# Altium PCB PCB1.PcbDoc (part 1 of 5)
Units mm, origin at the board's own origin, x right, y up, seen from the top; angles counter-clockwise.
Board outline 160 x 110 mm, 4 copper layers (Top Layer, Power Layer, GND Layer, Bottom Layer), stack 1.714 mm thick; 504 components, 362 nets, 1765 pads, 999 vias.
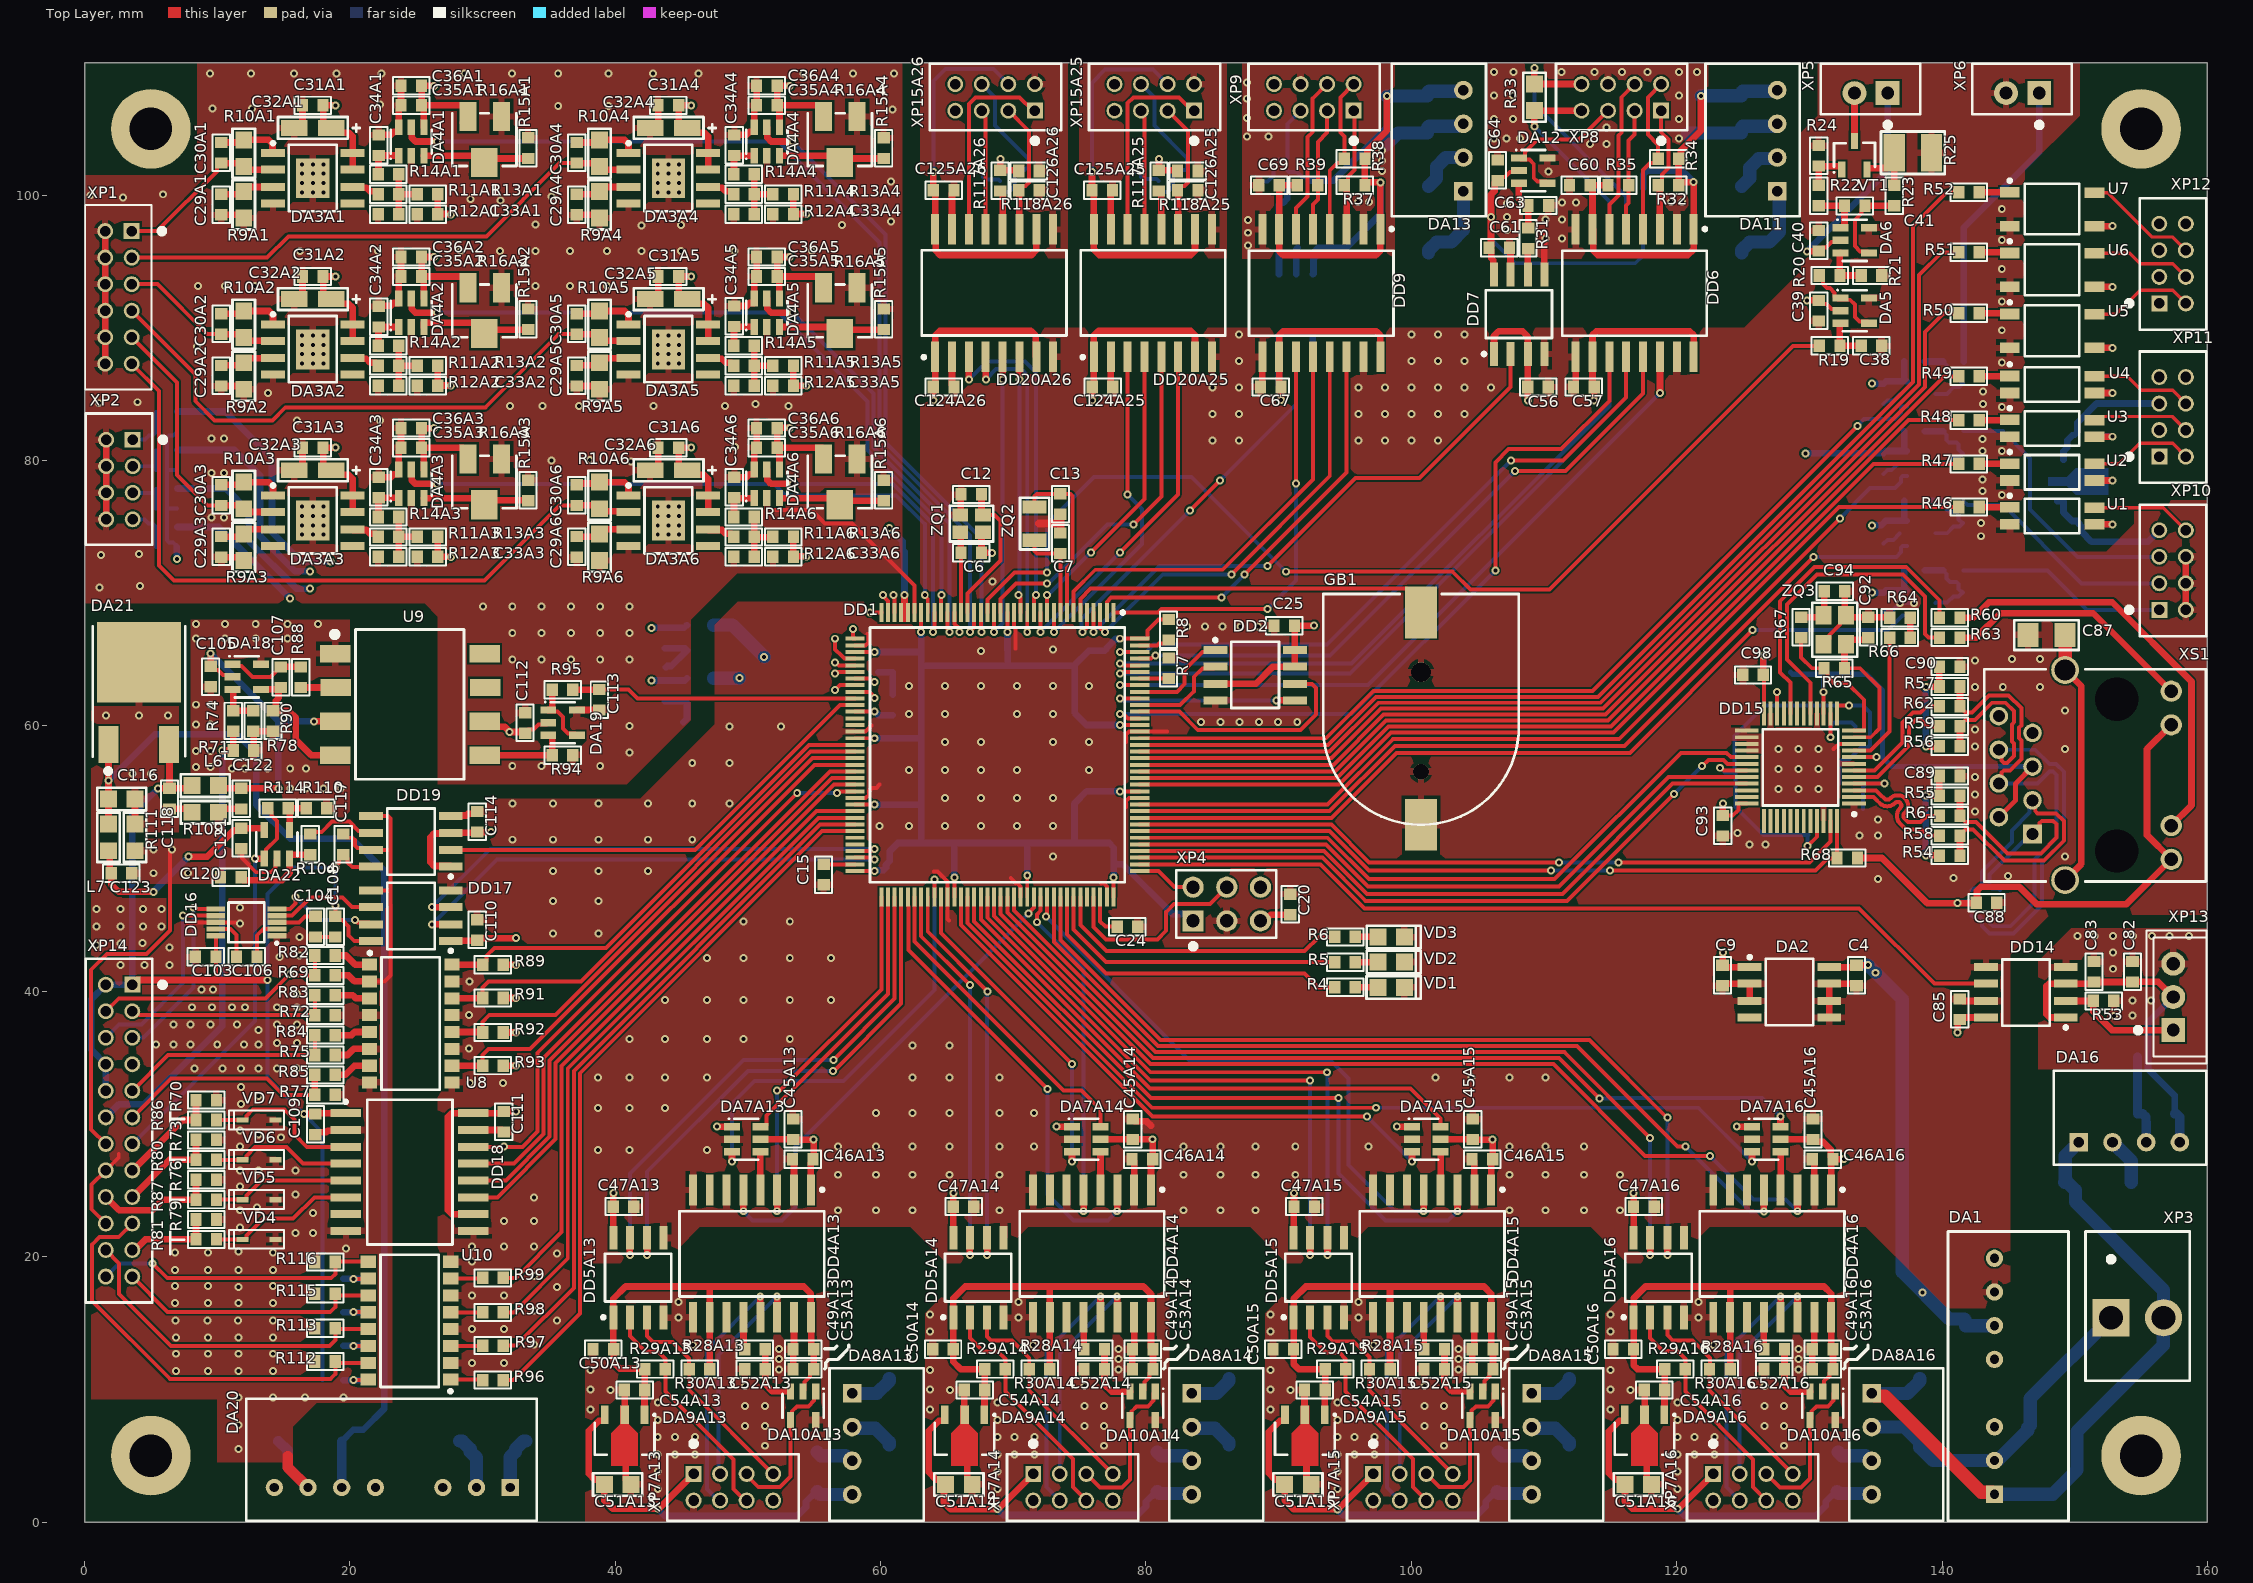
[diagram p0: Top Layer view]
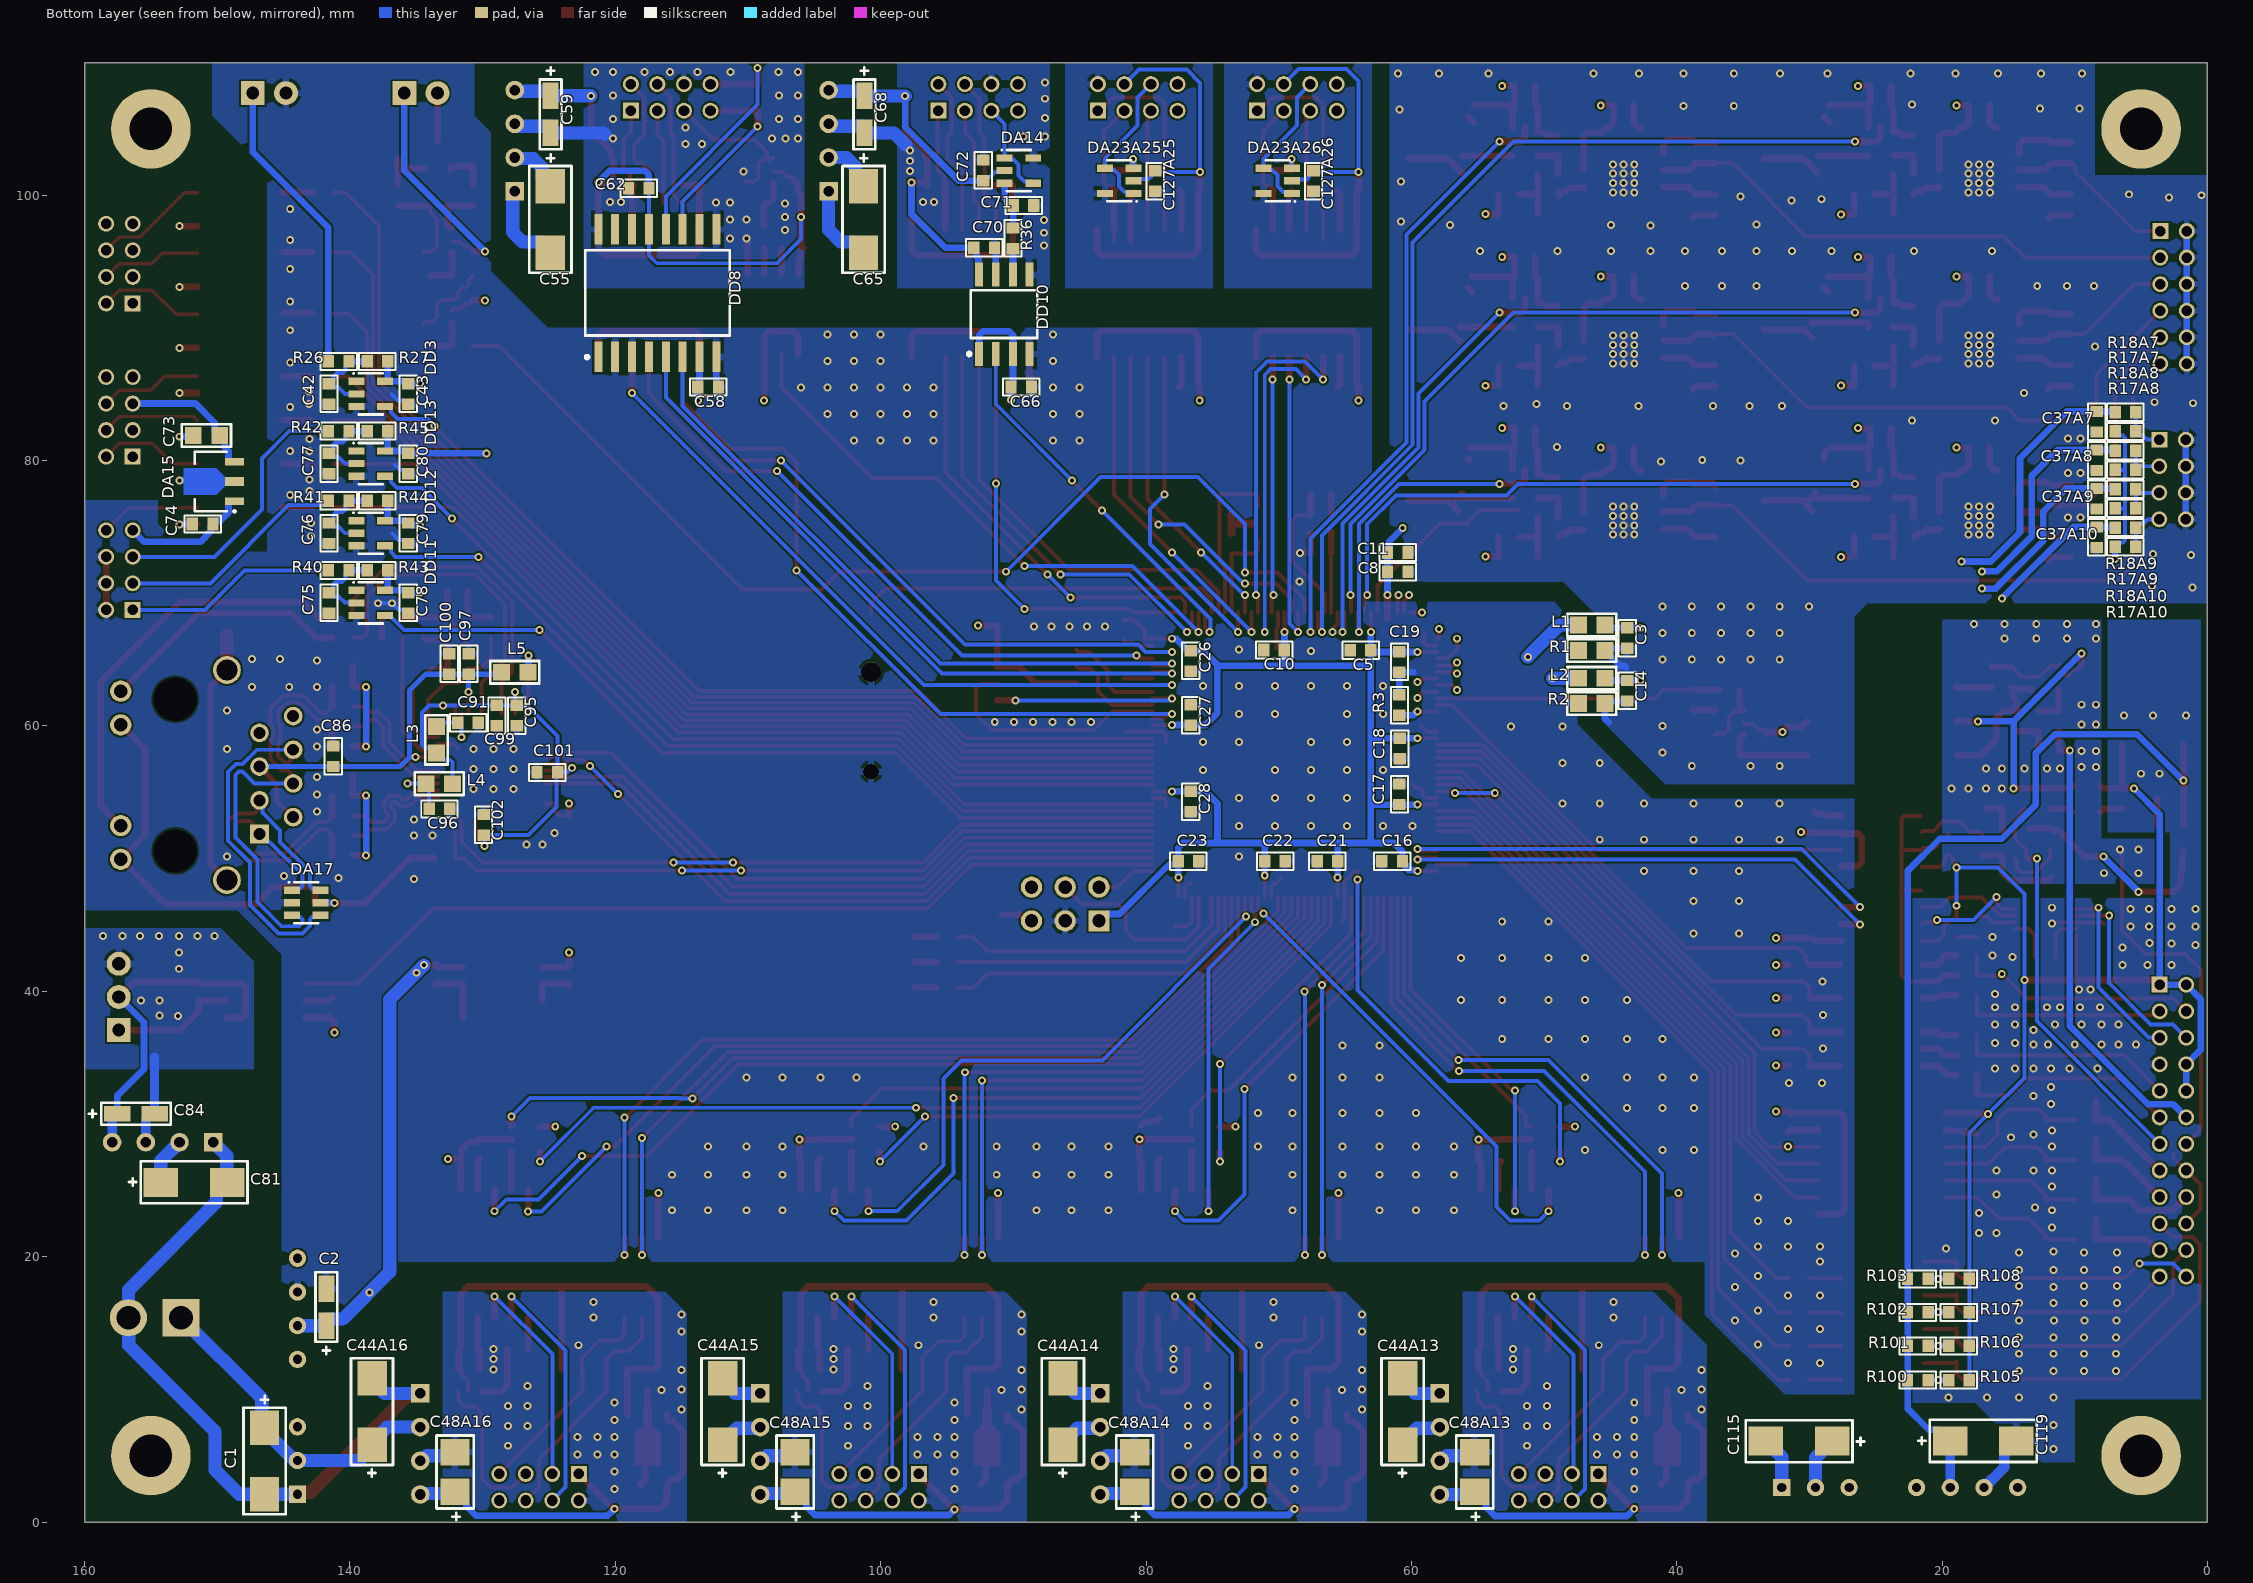
[diagram p1: Bottom Layer view, seen from below]
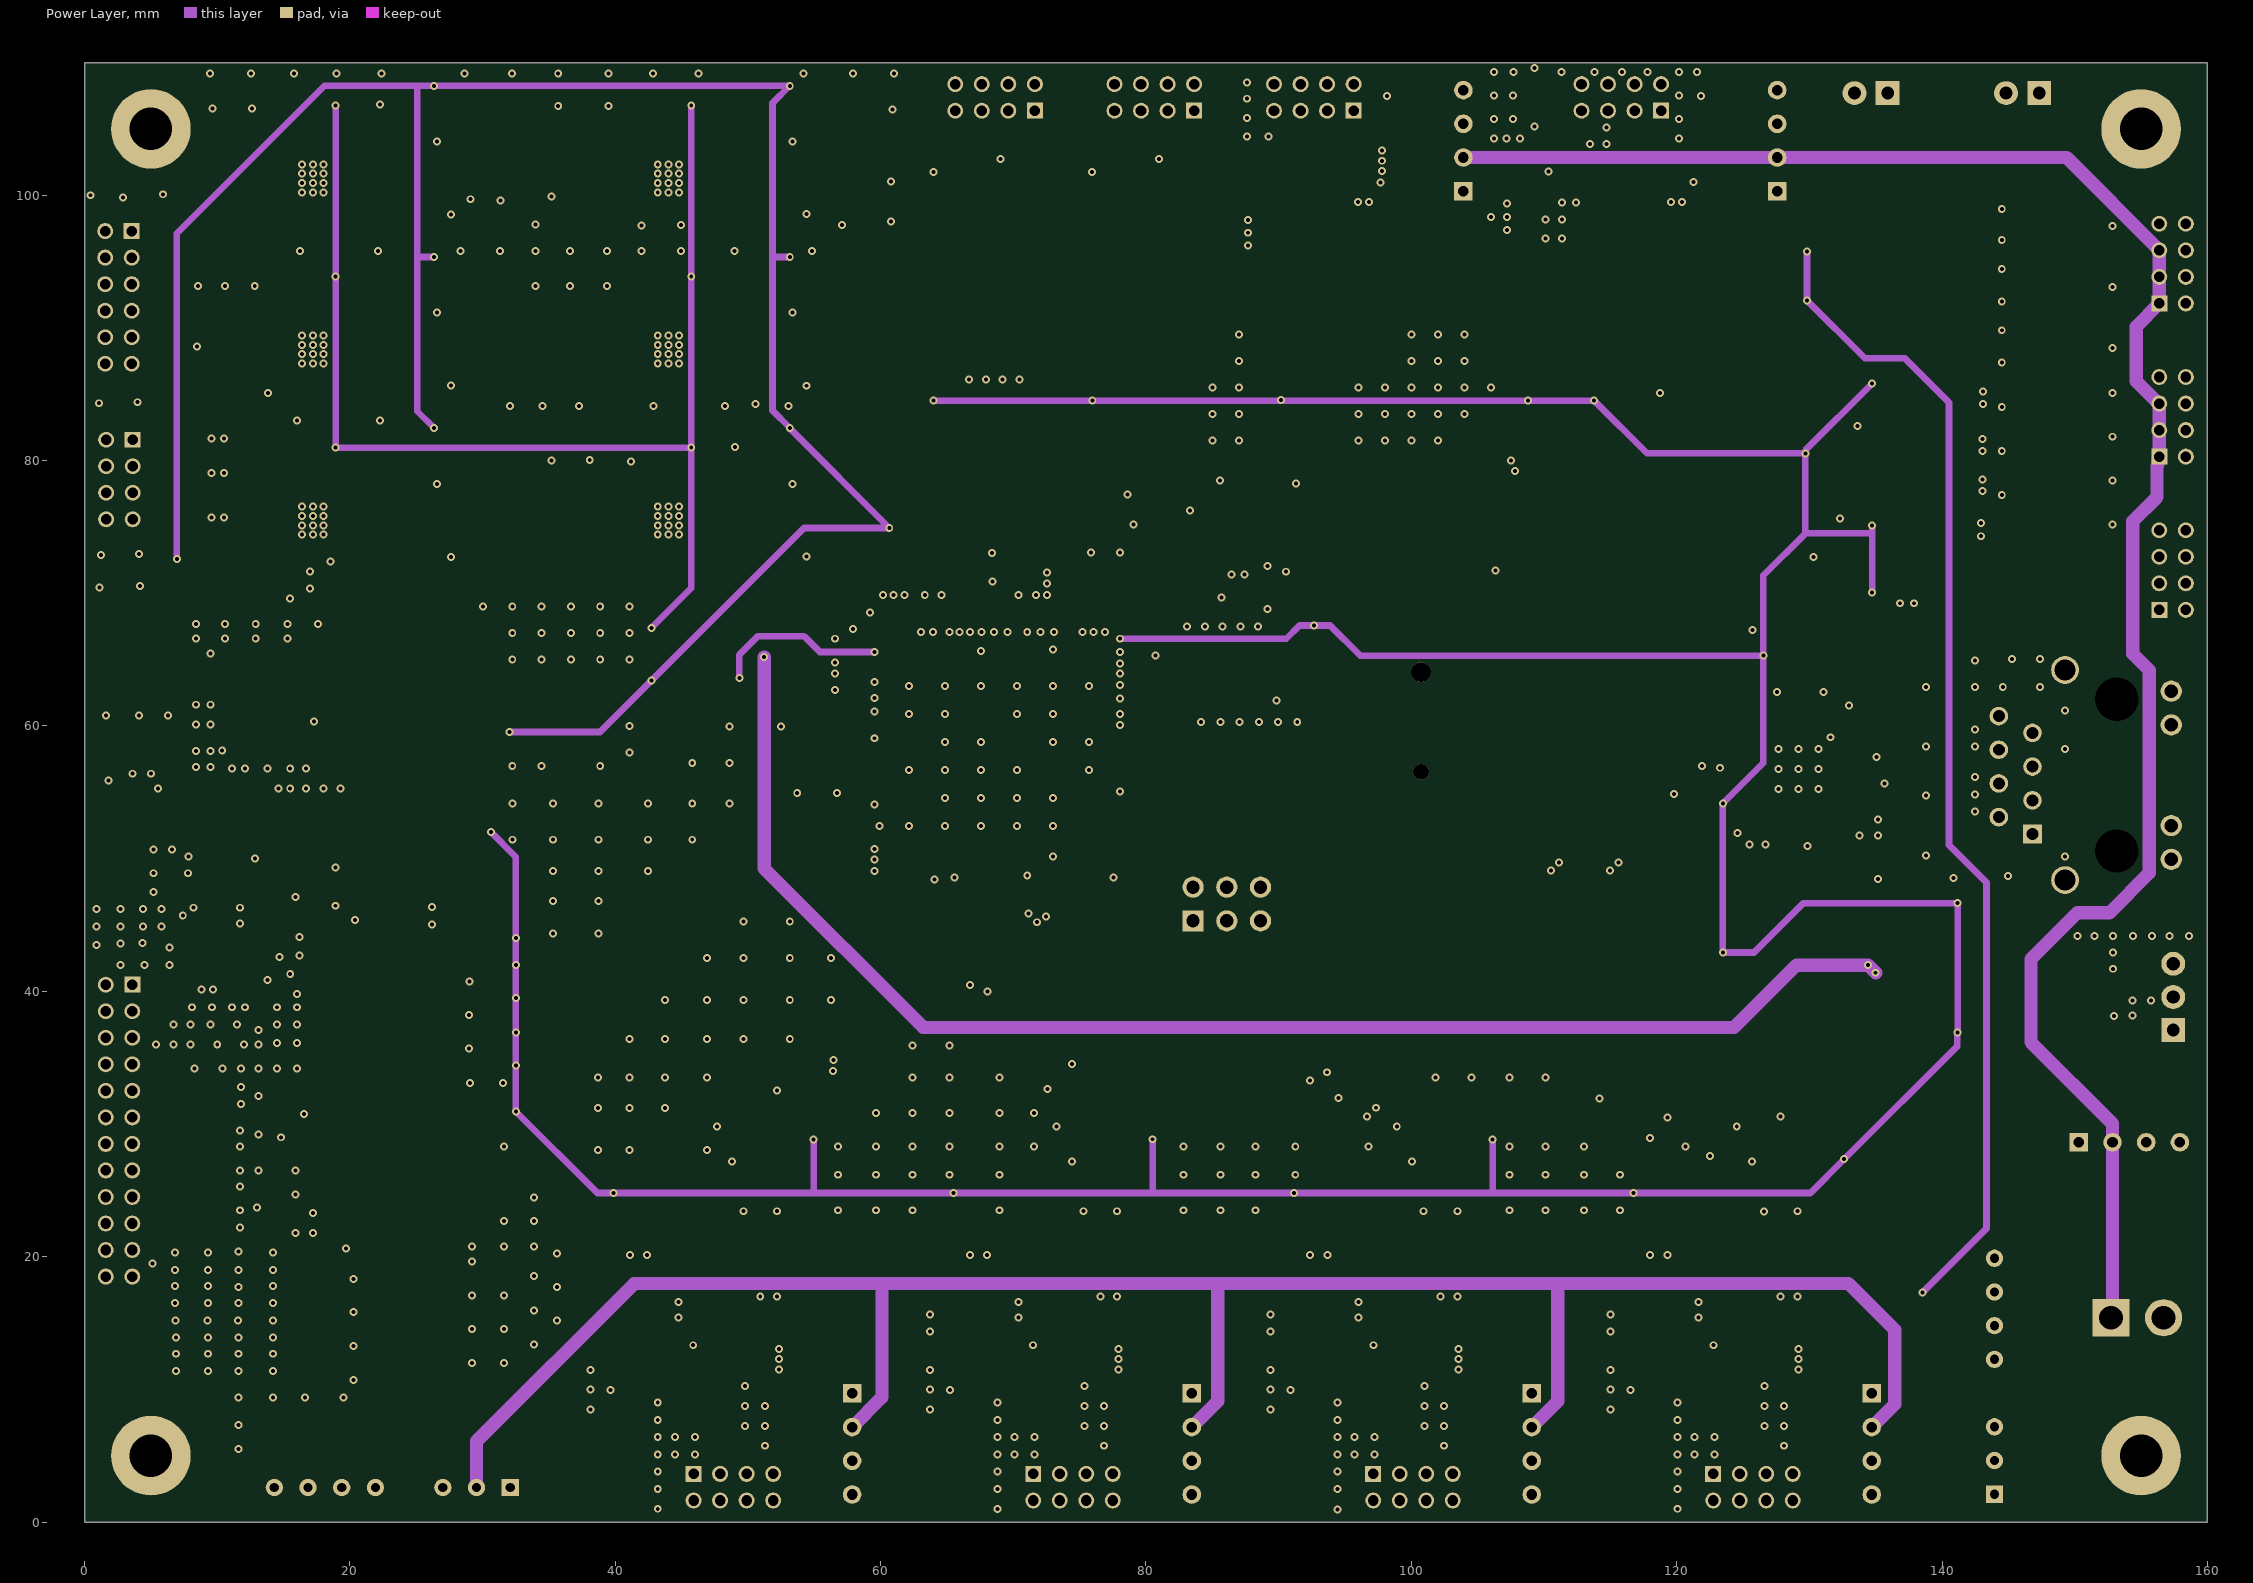
[diagram p2: Power Layer]
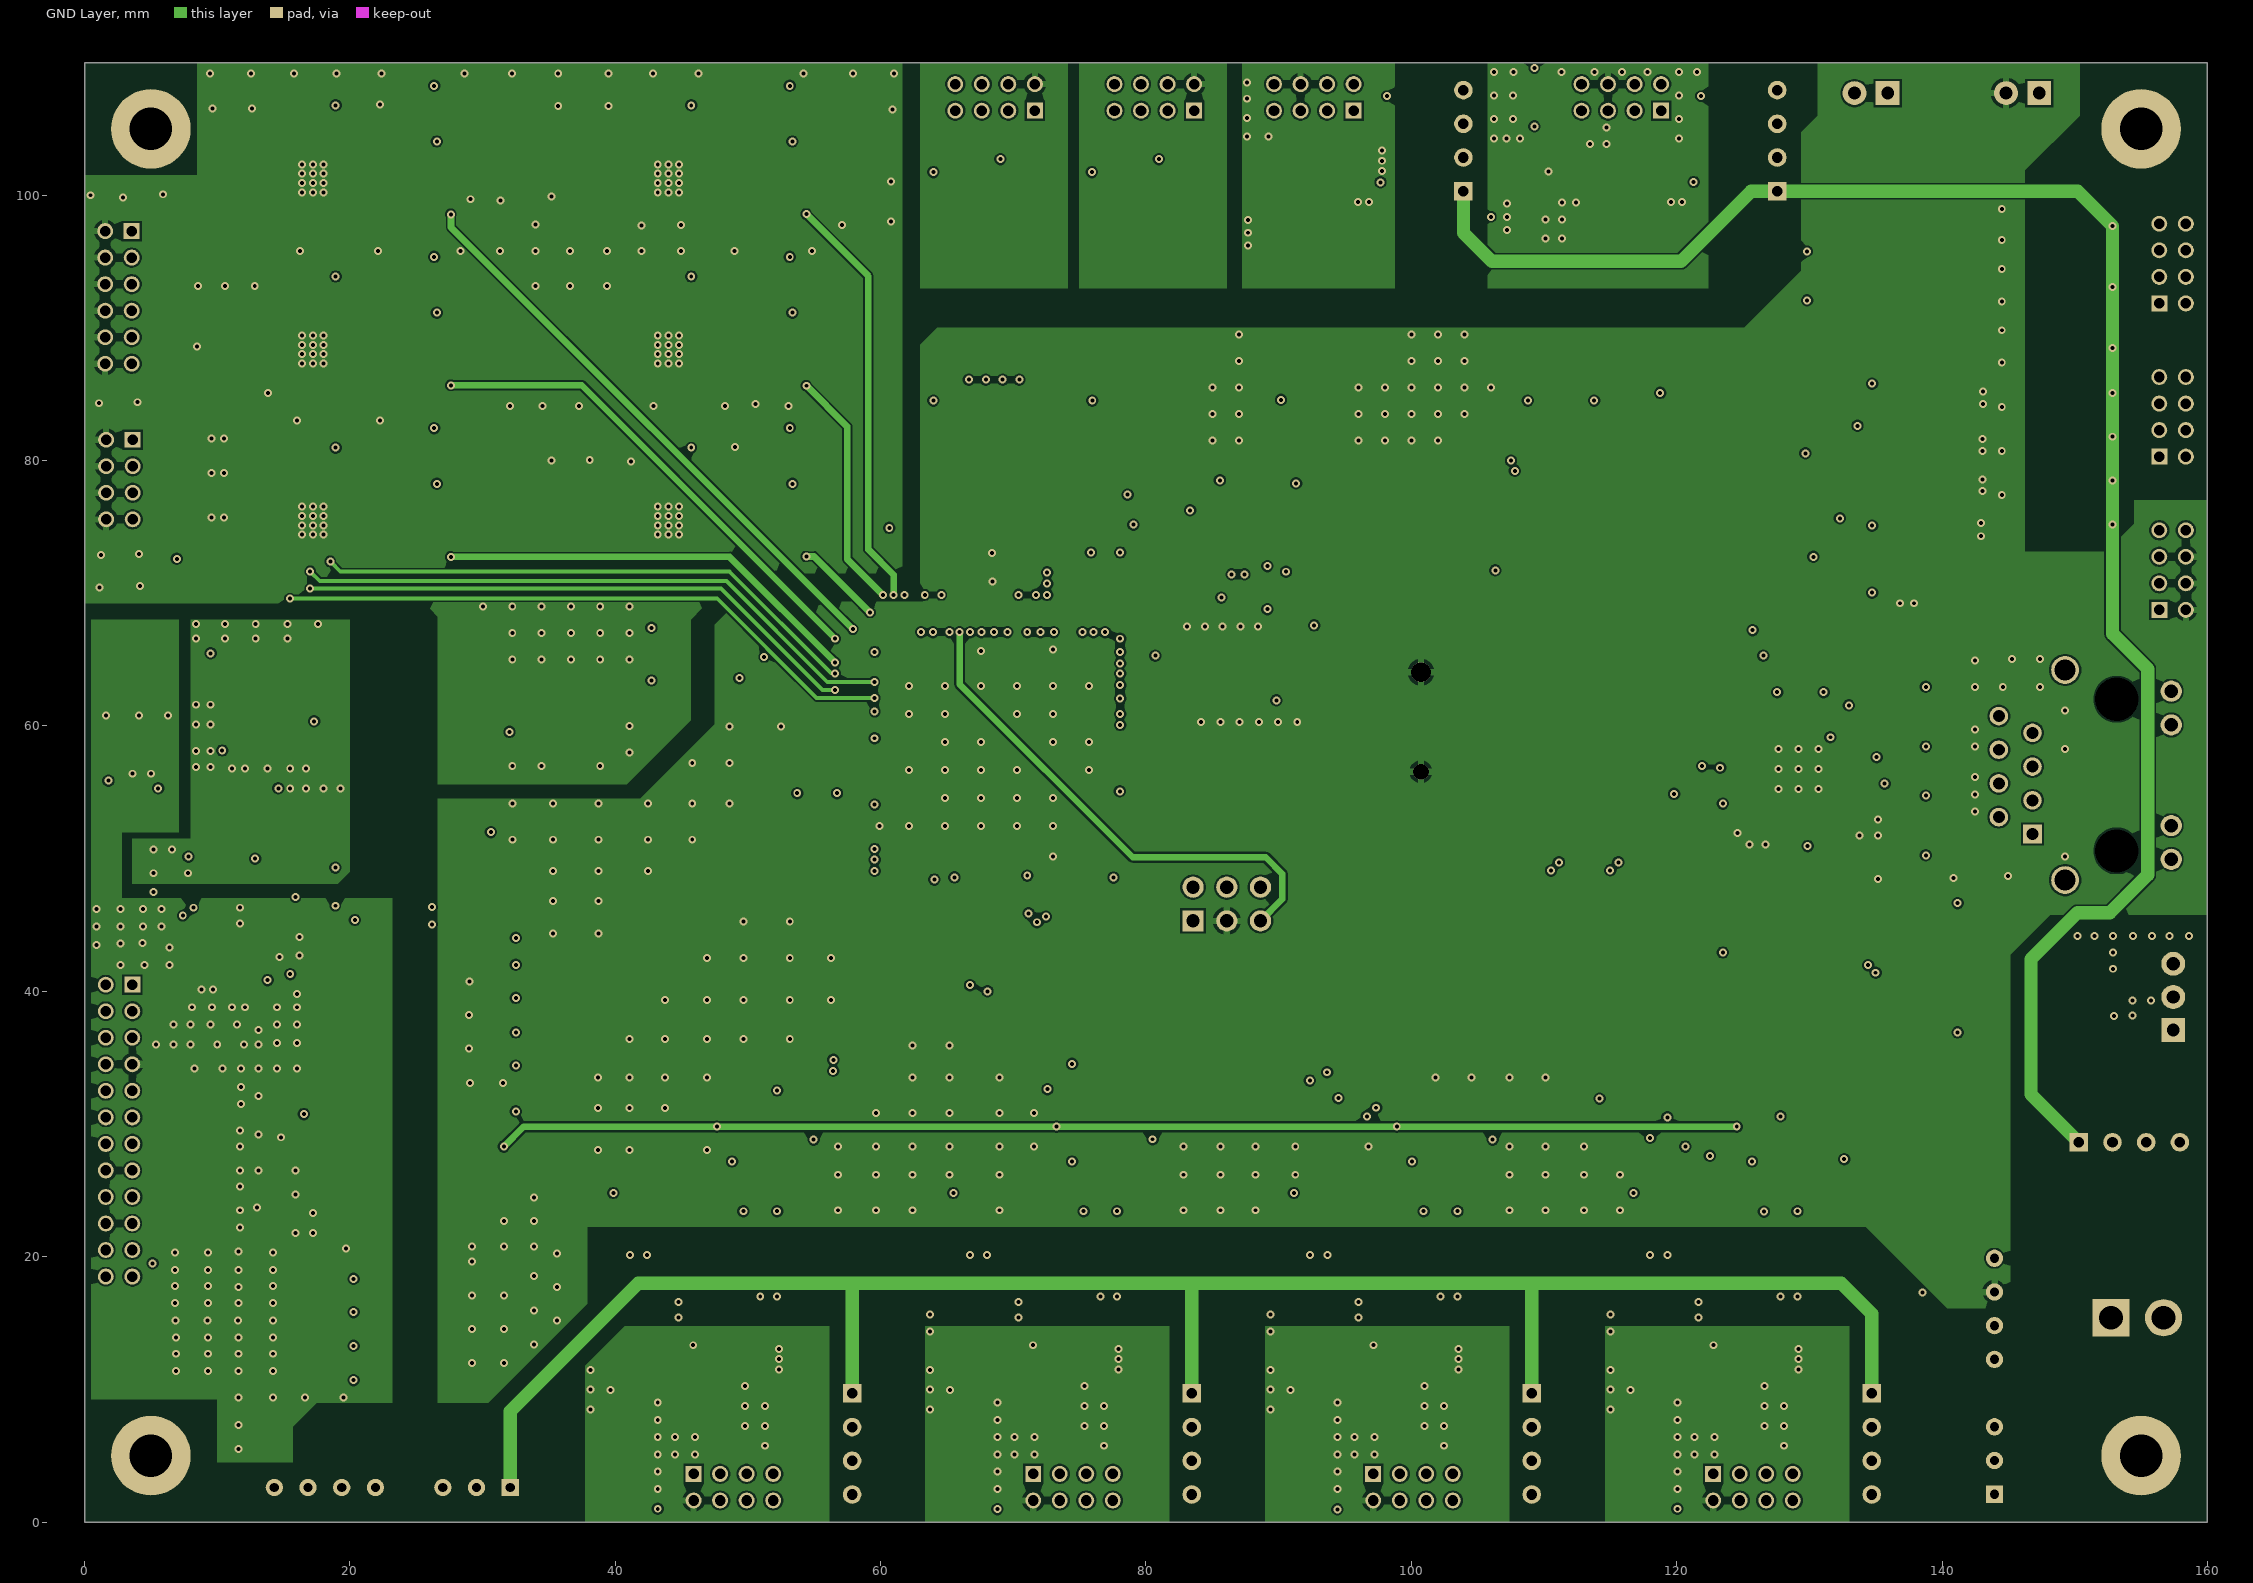
[diagram p3: GND Layer]
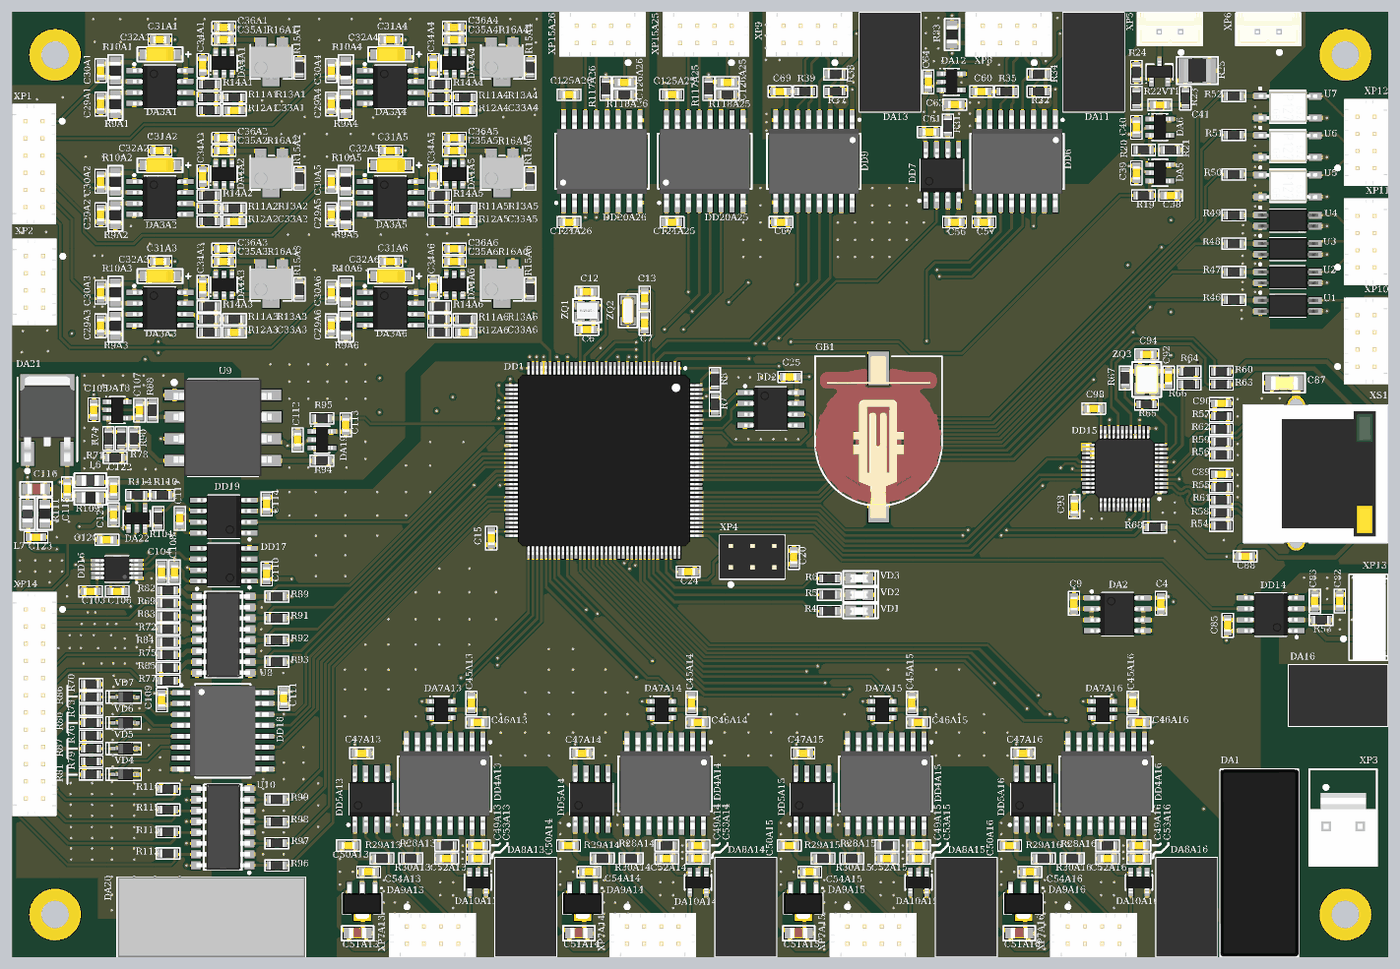
[diagram p7: 3D render of the assembled board from above, using the file's embedded part models]
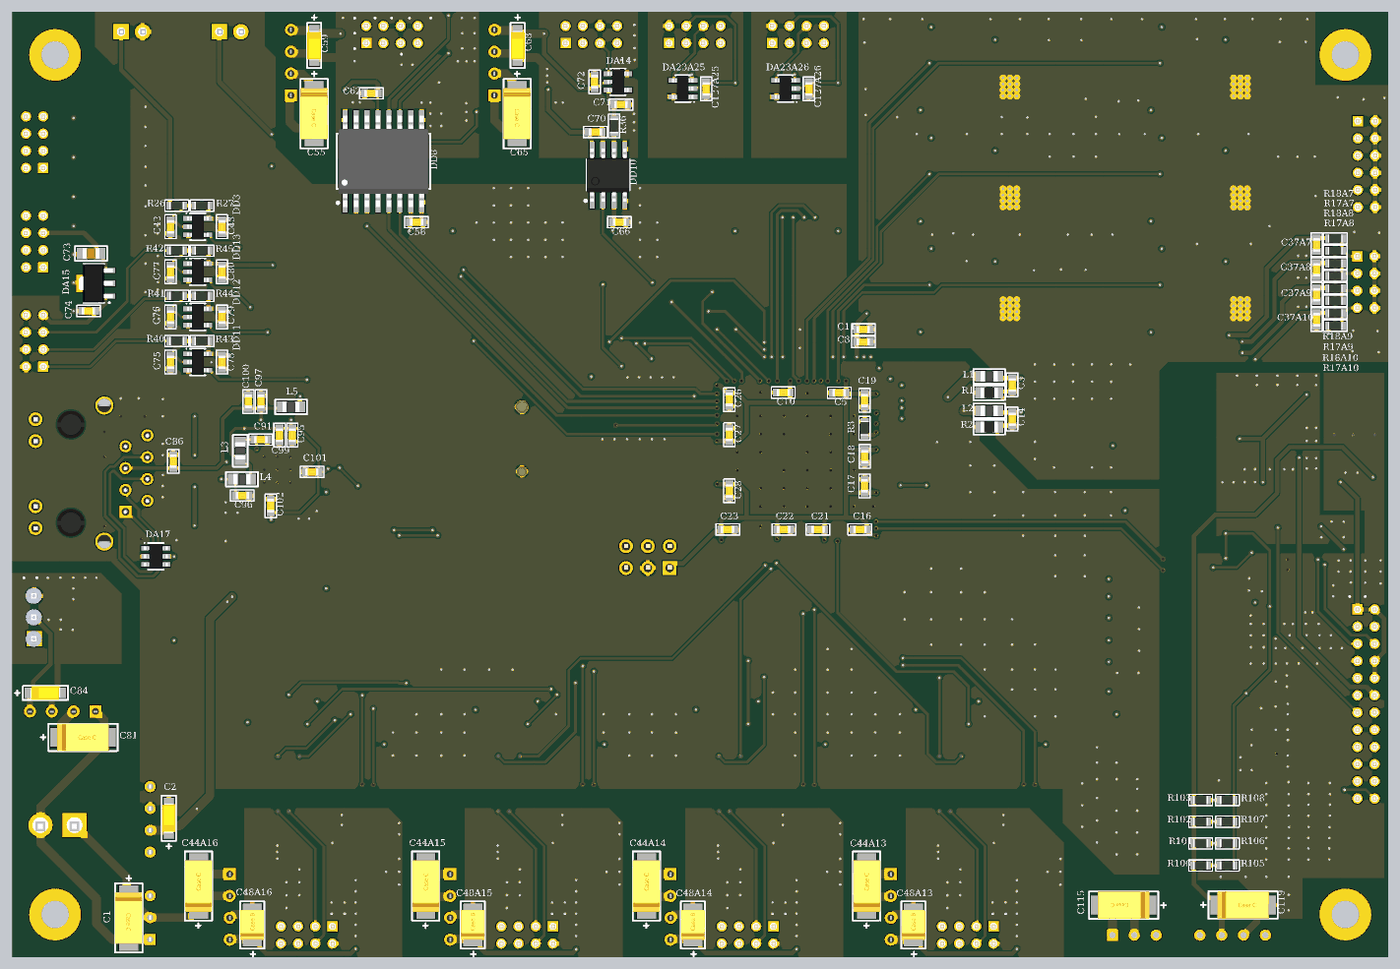
[diagram p8: 3D render of the assembled board from below, using the file's embedded part models]

## Layer stack, top to bottom
Top Solder: solder mask 0.0102, Solder Resist, Dk 3.5
Top Layer: signal copper 0.018
Dielectric 2: prepreg 0.0711, PP-006, Dk 4.1
Power Layer: signal copper 0.018
Dielectric 1: dielectric 1.5, FR-4, Dk 4.8
GND Layer: signal copper 0.018
Dielectric 3: prepreg 0.0711, PP-006, Dk 4.1
Bottom Layer: signal copper 0.018
Bottom Solder: solder mask 0.0102, Solder Resist, Dk 3.5

## Board outline
0,0 160,0 160,110 0,110

## Design rules (kind name [scope] priority, off if disabled: settings)
BoardOutlineClearance [(OnLayer('Bottom Layer') AND OnLayer('Top Layer'))] p1: gap=0.2 ignorepadtopadclearanceinfootprint=FALSE
Clearance [All] p1: gap=0.15 ignorepadtopadclearanceinfootprint=TRUE
DiffPairsRouting [All] p1: maxlimit=0.254 minlimit=0.2 mostfreqgap=0.254 toplayer_minwidth=0.3 toplayer_maxwidth=0.381 toplayer_prefwidth=0.381 midlayer1_minwidth=0.3 midlayer1_maxwidth=0.381 midlayer1_prefwidth=0.381 midlayer2_minwidth=0.3 midlayer2_maxwidth=0.381 midlayer2_prefwidth=0.381 bottomlayer_minwidth=0.3 bottomlayer_maxwidth=0.381 bottomlayer_prefwidth=0.381 maxuncoupledlength=12.7
Height [(OnLayer('Bottom Layer'))] p1: minheight=0 maxheight=3 prefheight=3
HoleSize [All] p1: absolutevalues=TRUE maxlimit=10 minlimit=0.2 maxpercent=80.000 minpercent=20.000
MinimumSolderMaskSliver [All] p1: minsoldermaskwidth=0.04
PlaneClearance [All] p1: clearance=0.5
PlaneConnect [All] p1: planeconnectstyle=Relief reliefexpansion=0.5 reliefentries=4 reliefconductorwidth=0.25 reliefairgap=0.25
PolygonConnect [All] p1: thpad.connectstyle=Relief thpad.reliefconductorwidth=0.5 thpad.reliefentries=4 thpad.polygonreliefangle="90 Angle" thpad.airgapwidth=0.25 smdpad.connectstyle=Relief smdpad.reliefconductorwidth=0.5 smdpad.reliefentries=4 smdpad.polygonreliefangle="90 Angle" smdpad.airgapwidth=0.25 via.connectstyle=Direct via.reliefconductorwidth=0.254 via.reliefentries=4 via.polygonreliefangle="90 Angle" via.airgapwidth=0.152
RoutingCorners [All] p1: cornerstyle=Round minsetback=0.254 maxsetback=2.54
RoutingVias [All] p1: holewidth=0.2 width=0.5 viastyle="Through Hole" minholewidth=0.2 minwidth=0.5 maxholewidth=1 maxwidth=1
SilkToSilkClearance [All] p1: silktosilkclearance=0.1
SilkToSolderMaskClearance [IsPad] p1: minsilkscreentomaskgap=0 clearancetoexposedcopper=TRUE
SolderMaskExpansion [All] p1: expansion=0.102 istentingtop=FALSE
Width [All] p1: maxlimit=1 minlimit=0.2 preferedwidth=0.3 minimp=50.000000 maximp=50.000000 favimp=50.000000
21 further rules are at their usual default settings.

## Classes and differential pairs
differential pair class TD: TXO
differential pair class RD: RXI
channel class Thermistor: A7 A8 A9 A10
channel class SF_driver: A25 A26
channel class Photodiode: A1 A2 A3 A4 A5 A6
channel class LD_driver: A13 A14 A15 A16
component class Main: C1 C2 C3 C4 C5 C6 C7 C8 C9 C10 C11 C12 C13 C14 C15 C16 C17 C18 C19 C20 C21 C22 C23 C24 C25 C26 C27 C28 DA1 DA2 DD1 DD2 GB1 L1 L2 R1 R2 R3 R4 R5 R6 R7 R8 VD1 VD2 VD3 XP1 XP2 XP3 XP4 ZQ1 ZQ2
component class A26: C124A26 C125A26 C126A26 C127A26 DA23A26 DD20A26 R117A26 R118A26 XP15A26
component class A25: C124A25 C125A25 C126A25 C127A25 DA23A25 DD20A25 R117A25 R118A25 XP15A25
component class A24: C103 C104 C105 C106 C107 C108 C109 C110 C111 C112 C113 C114 C115 C116 C117 C118 C119 C120 C121 C122 C123 DA18 DA19 DA20 DA21 DA22 DD16 DD17 DD18 DD19 L6 L7 R69 R70 R71 R72 R73 R74 R75 R76 R77 R78 R79 R80 R81 R82 R83 R84 R85 R86 R87 R88 R89 R90 R91 R92 R93 R94 R95 R96 R97 R98 R99 R100 R101 R102 R103 R104 R105 R106 R107 R108 R109 R110 R111 R112 R113 R114 R115 R116 U8 U9 U10 VD4 VD5 VD6 VD7 XP14
component class A23: C86 C87 C88 C89 C90 C91 C92 C93 C94 C95 C96 C97 C98 C99 C100 C101 C102 DA17 DD15 L3 L4 L5 R54 R55 R56 R57 R58 R59 R60 R61 R62 R63 R64 R65 R66 R67 R68 XS1 ZQ3
component class A22: C81 C82 C83 C84 C85 DA16 DD14 R53 XP13
component class A21: R50 R51 R52 U5 U6 U7 XP12
component class A20: R47 R48 R49 U2 U3 U4 XP11
component class A19: C73 C74 C75 C76 C77 C78 C79 C80 DA15 DD11 DD12 DD13 R40 R41 R42 R43 R44 R45 R46 U1 XP10
component class A18: C65 C66 C67 C68 C69 C70 C71 C72 DA13 DA14 DD9 DD10 R36 R37 R38 R39 XP9
component class A17: C55 C56 C57 C58 C59 C60 C61 C62 C63 C64 DA11 DA12 DD6 DD7 DD8 R31 R32 R33 R34 R35 XP8
component class A16: C44A16 C45A16 C46A16 C47A16 C48A16 C49A16 C50A16 C51A16 C52A16 C53A16 C54A16 DA7A16 DA8A16 DA9A16 DA10A16 DD4A16 DD5A16 R28A16 R29A16 R30A16 XP7A16
component class A15: C44A15 C45A15 C46A15 C47A15 C48A15 C49A15 C50A15 C51A15 C52A15 C53A15 C54A15 DA7A15 DA8A15 DA9A15 DA10A15 DD4A15 DD5A15 R28A15 R29A15 R30A15 XP7A15
component class A14: C44A14 C45A14 C46A14 C47A14 C48A14 C49A14 C50A14 C51A14 C52A14 C53A14 C54A14 DA7A14 DA8A14 DA9A14 DA10A14 DD4A14 DD5A14 R28A14 R29A14 R30A14 XP7A14
component class A13: C44A13 C45A13 C46A13 C47A13 C48A13 C49A13 C50A13 C51A13 C52A13 C53A13 C54A13 DA7A13 DA8A13 DA9A13 DA10A13 DD4A13 DD5A13 R28A13 R29A13 R30A13 XP7A13
component class A12: C42 C43 DD3 R26 R27 XP6
component class A11: C38 C39 C40 C41 DA5 DA6 R19 R20 R21 R22 R23 R24 R25 VT1 XP5
component class A10: C37A10 R17A10 R18A10
component class A9: C37A9 R17A9 R18A9
component class A8: C37A8 R17A8 R18A8
component class A7: C37A7 R17A7 R18A7
component class A6: C29A6 C30A6 C31A6 C32A6 C33A6 C34A6 C35A6 C36A6 DA3A6 DA4A6 R9A6 R10A6 R11A6 R12A6 R13A6 R14A6 R15A6 R16A6
component class A5: C29A5 C30A5 C31A5 C32A5 C33A5 C34A5 C35A5 C36A5 DA3A5 DA4A5 R9A5 R10A5 R11A5 R12A5 R13A5 R14A5 R15A5 R16A5
component class A4: C29A4 C30A4 C31A4 C32A4 C33A4 C34A4 C35A4 C36A4 DA3A4 DA4A4 R9A4 R10A4 R11A4 R12A4 R13A4 R14A4 R15A4 R16A4
component class A3: C29A3 C30A3 C31A3 C32A3 C33A3 C34A3 C35A3 C36A3 DA3A3 DA4A3 R9A3 R10A3 R11A3 R12A3 R13A3 R14A3 R15A3 R16A3
component class A2: C29A2 C30A2 C31A2 C32A2 C33A2 C34A2 C35A2 C36A2 DA3A2 DA4A2 R9A2 R10A2 R11A2 R12A2 R13A2 R14A2 R15A2 R16A2
component class A1: C29A1 C30A1 C31A1 C32A1 C33A1 C34A1 C35A1 C36A1 DA3A1 DA4A1 R9A1 R10A1 R11A1 R12A1 R13A1 R14A1 R15A1 R16A1
differential pair TXO: +TXO_P -TXO_N
differential pair TD: +TD_P -TD_N
differential pair RXI: +RXI_P -RXI_N
differential pair RD: +RD_P -RD_N

## Components (designator, comment, footprint, x,y, rotation, side; value= is the part's Value field where it differs from the comment)
C1 "10мкФх35B" CAP_C 146.45,7.1 r270 bottom locked
C2 "10мкФх10B" CAP_A 141.775,14.8 r90 bottom
C3 "0,1мкФ" CAP_0603 43.725,67.425 r270 bottom
C4 "0,1мкФ" CAP_0603 133.55,42 r270 top
C5 "0,1мкФ" CAP_0603 63.025,65.7 r0 bottom
C6 "8пФ" CAP_0603 66.025,73.05 r0 top
C7 "18пФ" CAP_0603 73.55,72.975 r90 top
C8 "0,1мкФ" CAP_0603 60.225,71.625 r0 bottom
C9 "2,2мкФ" CAP_0603 123.45,42 r270 top
C10 "0,1мкФ" CAP_0603 71.15,65.725 r180 bottom
C11 "0,1мкФ" CAP_0603 60.225,73.075 r0 bottom
C12 "8пФ" CAP_0603 67.625,77.45 r180 top
C13 "18пФ" CAP_0603 73.55,77.525 r270 top
C14 "0,1мкФ" CAP_0603 43.725,63.45 r270 bottom
C15 "2,2мкФ" CAP_0603 55.7,49.6 r270 top
C16 "0,1мкФ" CAP_0603 62.25,49.8 r180 bottom
C17 "0,1мкФ" CAP_0603 60.9,54.05 r90 bottom
C18 "0,1мкФ" CAP_0603 60.875,59.1 r270 bottom
C19 "0,1мкФ" CAP_0603 60.9,65.625 r270 bottom
C20 "0,1мкФ" CAP_0603 90.875,45.75 r90 top
C21 "0,1мкФ" CAP_0603 67.125,49.8 r180 bottom
C22 "0,1мкФ" CAP_0603 69.475,49.8 r0 bottom
C23 "0,1мкФ" CAP_0603 76,49.8 r0 bottom
C24 "2,2мкФ" CAP_0603 77.8,44.875 r0 top
C25 "0,1мкФ" CAP_0603 91.225,67.55 r180 top
C26 "0,1мкФ" CAP_0603 76.625,64.1 r90 bottom
C27 "0,1мкФ" CAP_0603 76.625,60.025 r90 bottom
C28 "0,1мкФ" CAP_0603 76.625,55.1 r270 bottom
C29A1 "0,1мкФ" CAP_0603 10.3,98.5 r90 top (schematic designator C29)
C29A2 "0,1мкФ" CAP_0603 10.3,85.6 r90 top (schematic designator C29)
C29A3 "0,1мкФ" CAP_0603 10.3,72.7 r90 top (schematic designator C29)
C29A4 "0,1мкФ" CAP_0603 37.1,98.5 r90 top (schematic designator C29)
C29A5 "0,1мкФ" CAP_0603 37.1,85.6 r90 top (schematic designator C29)
C29A6 "0,1мкФ" CAP_0603 37.1,72.7 r90 top (schematic designator C29)
C30A1 "10пФ" CAP_0603 10.3,104 r270 top (schematic designator C30)
C30A2 "10пФ" CAP_0603 10.3,91.1 r270 top (schematic designator C30)
C30A3 "10пФ" CAP_0603 10.3,78.2 r270 top (schematic designator C30)
C30A4 "10пФ" CAP_0603 37.1,104 r270 top (schematic designator C30)
C30A5 "10пФ" CAP_0603 37.1,91.1 r270 top (schematic designator C30)
C30A6 "10пФ" CAP_0603 37.1,78.2 r270 top (schematic designator C30)
C31A1 "0,1мкФ" CAP_0603 18,106.775 r180 top (schematic designator C31)
C31A2 "0,1мкФ" CAP_0603 18,93.875 r180 top (schematic designator C31)
C31A3 "0,1мкФ" CAP_0603 18,80.975 r180 top (schematic designator C31)
C31A4 "0,1мкФ" CAP_0603 44.8,106.775 r180 top (schematic designator C31)
C31A5 "0,1мкФ" CAP_0603 44.8,93.875 r180 top (schematic designator C31)
C31A6 "0,1мкФ" CAP_0603 44.8,80.975 r180 top (schematic designator C31)
C32A1 "10мкФх10B" CAP_A 18.6,105.075 r180 top (schematic designator C32)
C32A2 "10мкФх10B" CAP_A 18.6,92.175 r180 top (schematic designator C32)
C32A3 "10мкФх10B" CAP_A 18.6,79.275 r180 top (schematic designator C32)
C32A4 "10мкФх10B" CAP_A 45.425,105.075 r180 top (schematic designator C32)
C32A5 "10мкФх10B" CAP_A 45.425,92.175 r180 top (schematic designator C32)
C32A6 "10мкФх10B" CAP_A 45.425,79.275 r180 top (schematic designator C32)
C33A1 "0,1мкФ" CAP_0603 26.65,98.575 r180 top (schematic designator C33)
C33A2 "0,1мкФ" CAP_0603 26.65,85.65 r180 top (schematic designator C33)
C33A3 "0,1мкФ" CAP_0603 26.65,72.75 r180 top (schematic designator C33)
C33A4 "0,1мкФ" CAP_0603 53.45,98.575 r180 top (schematic designator C33)
C33A5 "0,1мкФ" CAP_0603 53.45,85.65 r180 top (schematic designator C33)
C33A6 "0,1мкФ" CAP_0603 53.45,72.75 r180 top (schematic designator C33)
C34A1 "10нФ" CAP_0603 22.175,102.975 r90 top (schematic designator C34)
C34A2 "10нФ" CAP_0603 22.175,90.05 r90 top (schematic designator C34)
C34A3 "10нФ" CAP_0603 22.175,77.175 r90 top (schematic designator C34)
C34A4 "10нФ" CAP_0603 48.975,102.975 r90 top (schematic designator C34)
C34A5 "10нФ" CAP_0603 48.975,90.075 r90 top (schematic designator C34)
C34A6 "10нФ" CAP_0603 48.975,77.175 r90 top (schematic designator C34)
C35A1 "0,1мкФ" CAP_0603 25.425,106.775 r180 top (schematic designator C35)
C35A2 "0,1мкФ" CAP_0603 25.425,93.875 r180 top (schematic designator C35)
C35A3 "0,1мкФ" CAP_0603 25.425,80.975 r180 top (schematic designator C35)
C35A4 "0,1мкФ" CAP_0603 52.225,106.775 r180 top (schematic designator C35)
C35A5 "0,1мкФ" CAP_0603 52.225,93.875 r180 top (schematic designator C35)
C35A6 "0,1мкФ" CAP_0603 52.225,80.975 r180 top (schematic designator C35)
C36A1 "2,2мкФ" CAP_0603 25.425,108.25 r180 top (schematic designator C36)
C36A2 "2,2мкФ" CAP_0603 25.425,95.35 r180 top locked (schematic designator C36)
C36A3 "2,2мкФ" CAP_0603 25.425,82.45 r180 top (schematic designator C36)
C36A4 "2,2мкФ" CAP_0603 52.225,108.25 r180 top locked (schematic designator C36)
C36A5 "2,2мкФ" CAP_0603 52.225,95.35 r180 top (schematic designator C36)
C36A6 "2,2мкФ" CAP_0603 52.225,82.45 r180 top (schematic designator C36)
C37A7 "0,1мкФ" CAP_0603 8.35,83.725 r270 bottom (schematic designator C37)
C37A8 "0,1мкФ" CAP_0603 8.35,80.825 r270 bottom (schematic designator C37)
C37A9 "0,1мкФ" CAP_0603 8.35,77.925 r270 bottom (schematic designator C37)
C37A10 "0,1мкФ" CAP_0603 8.35,75.025 r270 bottom (schematic designator C37)
C38 "0,1мкФ" CAP_0603 133.875,88.65 r0 top locked
C39 "0,1мкФ" CAP_0603 130.7,92.1 r270 top locked
C40 "0,1мкФ" CAP_0603 130.7,95.775 r90 top locked
C41 "100пФ" CAP_0603 132.625,99.2 r0 top locked
C42 "1мкФ" CAP_0603 141.575,85.825 r270 bottom
C43 "0,1мкФ" CAP_0603 135.6,85.825 r270 bottom
C44A13 "10мкФх35B" CAP_C 60.65,5.825 r90 bottom (schematic designator C44)
C44A14 "10мкФх35B" CAP_C 86.25,5.825 r90 bottom (schematic designator C44)
C44A15 "10мкФх35B" CAP_C 111.9,5.825 r90 bottom (schematic designator C44)
C44A16 "10мкФх35B" CAP_C 138.325,5.825 r90 bottom (schematic designator C44)
C45A13 "0,1мкФ" CAP_0603 53.4,28.8 r90 top (schematic designator C45)
C45A14 "0,1мкФ" CAP_0603 79,28.8 r90 top (schematic designator C45)
C45A15 "0,1мкФ" CAP_0603 104.625,28.8 r90 top (schematic designator C45)
C45A16 "0,1мкФ" CAP_0603 130.275,28.8 r90 top (schematic designator C45)
C46A13 "0,1мкФ" CAP_0603 54.925,27.35 r180 top (schematic designator C46)
C46A14 "0,1мкФ" CAP_0603 80.525,27.35 r180 top (schematic designator C46)
C46A15 "0,1мкФ" CAP_0603 106.15,27.35 r180 top (schematic designator C46)
C46A16 "0,1мкФ" CAP_0603 131.8,27.35 r180 top (schematic designator C46)
C47A13 "0,1мкФ" CAP_0603 39.825,23.775 r0 top (schematic designator C47)
C47A14 "0,1мкФ" CAP_0603 65.45,23.775 r0 top (schematic designator C47)
C47A15 "0,1мкФ" CAP_0603 91.125,23.775 r0 top (schematic designator C47)
C47A16 "0,1мкФ" CAP_0603 116.725,23.775 r0 top (schematic designator C47)
C48A13 "10мкФх25B" CAP_B 55.225,2.275 r90 bottom (schematic designator C48)
C48A14 "10мкФх25B" CAP_B 80.85,2.275 r90 bottom (schematic designator C48)
C48A15 "10мкФх25B" CAP_B 106.45,2.275 r90 bottom (schematic designator C48)
C48A16 "10мкФх25B" CAP_B 132.075,2.275 r90 bottom (schematic designator C48)
C49A13 "0,1мкФ" CAP_0603 54.975,13.025 r180 top (schematic designator C49)
C49A14 "0,1мкФ" CAP_0603 80.55,13.025 r180 top (schematic designator C49)
C49A15 "0,1мкФ" CAP_0603 106.175,13.025 r180 top (schematic designator C49)
C49A16 "0,1мкФ" CAP_0603 131.8,13.025 r180 top (schematic designator C49)
C50A13 "0,1мкФ" CAP_0603 39.9,13.025 r180 top (schematic designator C50)
C50A14 "0,1мкФ" CAP_0603 65.5,13.025 r180 top (schematic designator C50)
C50A15 "0,1мкФ" CAP_0603 91.15,13.025 r180 top (schematic designator C50)
C50A16 "0,1мкФ" CAP_0603 116.775,13.025 r180 top (schematic designator C50)
C51A13 "0,33мкФ" CAP_0805 41.175,2.825 r180 top (schematic designator C51)
C51A14 "0,33мкФ" CAP_0805 66.9,2.825 r180 top (schematic designator C51)
C51A15 "0,33мкФ" CAP_0805 92.45,2.825 r180 top (schematic designator C51)
C51A16 "0,33мкФ" CAP_0805 118.1,2.825 r180 top (schematic designator C51)
C52A13 "10нФ" CAP_0603 51.325,11.525 r180 top (schematic designator C52)
C52A14 "10нФ" CAP_0603 76.9,11.525 r180 top (schematic designator C52)
C52A15 "10нФ" CAP_0603 102.525,11.525 r180 top (schematic designator C52)
C52A16 "10нФ" CAP_0603 128.15,11.525 r180 top (schematic designator C52)
C53A13 "0,1мкФ" CAP_0603 54.975,11.525 r180 top (schematic designator C53)
C53A14 "0,1мкФ" CAP_0603 80.55,11.525 r180 top (schematic designator C53)
C53A15 "0,1мкФ" CAP_0603 106.175,11.525 r180 top (schematic designator C53)
C53A16 "0,1мкФ" CAP_0603 131.8,11.525 r180 top (schematic designator C53)
C54A13 "0,1мкФ" CAP_0603 42.25,9.95 r180 top (schematic designator C54)
C54A14 "0,1мкФ" CAP_0603 67.875,9.95 r180 top (schematic designator C54)
C54A15 "0,1мкФ" CAP_0603 93.525,9.95 r180 top (schematic designator C54)
C54A16 "0,1мкФ" CAP_0603 119.125,9.95 r180 top (schematic designator C54)
C55 "10мкФх35B" CAP_C 124.9,100.675 r270 bottom
C56 "0,1мкФ" CAP_0603 108.75,85.55 r0 top
C57 "0,1мкФ" CAP_0603 113.8,85.55 r180 top
C58 "0,1мкФ" CAP_0603 113.8,85.55 r180 bottom
C59 "10мкФх10B" CAP_A 124.875,107.5 r270 bottom
C60 "0,1мкФ" CAP_0603 113.5,100.75 r180 top
C61 "0,1мкФ" CAP_0603 105.825,96.038 r0 top
C62 "0,1мкФ" CAP_0603 117.435,100.535 r0 bottom
C63 "0,1мкФ" CAP_0603 108.775,99.225 r0 top
C64 "0,1мкФ" CAP_0603 106.5,101.075 r90 top
C65 "10мкФх35B" CAP_C 101.3,100.675 r270 bottom
C66 "0,1мкФ" CAP_0603 90.2,85.55 r180 bottom
C67 "0,1мкФ" CAP_0603 90.2,85.55 r180 top
C68 "10мкФх10B" CAP_A 101.225,107.5 r270 bottom
C69 "0,1мкФ" CAP_0603 90.075,100.75 r180 top
C70 "0,1мкФ" CAP_0603 93,96.038 r180 bottom locked
C71 "0,1мкФ" CAP_0603 90.025,99.225 r180 bottom locked
C72 "0,1мкФ" CAP_0603 92.275,101.075 r90 bottom
C73 "0,33мкФ" CAP_0805 151.815,81.9 r180 bottom
C74 "0,1мкФ" CAP_0603 150.3,75.225 r0 bottom
C75 "1мкФ" CAP_0603 141.575,70.075 r270 bottom
C76 "1мкФ" CAP_0603 141.575,75.325 r270 bottom
C77 "1мкФ" CAP_0603 141.575,80.575 r270 bottom
C78 "0,1мкФ" CAP_0603 135.6,70.075 r270 bottom
C79 "0,1мкФ" CAP_0603 135.6,75.325 r270 bottom
C80 "0,1мкФ" CAP_0603 135.6,80.575 r270 bottom
C81 "10мкФх35B" CAP_C 154.25,25.6 r180 bottom
C82 "0,1мкФ" CAP_0603 154.35,40.675 r90 top
C83 "0,1мкФ" CAP_0603 151.45,40.675 r90 top
C84 "10мкФх10B" CAP_A 157.525,30.775 r180 bottom
C85 "0,1мкФ" CAP_0603 141.325,37.85 r90 top
C86 "0,1мкФ" CAP_0603 141.254,56.912 r90 bottom locked
C87 "1нФх2кВ" CAP_1206 149.275,66.85 r180 top
C88 "0,1мкФ" CAP_0603 142.55,46.675 r0 top locked
C89 "0,1мкФ" CAP_0603 139.775,56.228 r0 top locked
C90 "0,1мкФ" CAP_0603 139.775,64.475 r0 top locked
C91 "0,1мкФ" CAP_0603 131.9,60.25 r180 bottom locked
C92 "8пФ" CAP_0603 134.45,66.625 r90 top locked
C93 "0,1мкФ" CAP_0603 123.475,53.275 r270 top locked
C94 "8пФ" CAP_0603 131.1,70.15 r0 top locked
C95 "0,1мкФ" CAP_0603 127.425,61.585 r270 bottom locked
C96 "0,1мкФ" CAP_0603 134.05,53.75 r180 bottom locked
C97 "0,1мкФ" CAP_0603 131.05,63.875 r90 bottom locked
C98 "0,1мкФ" CAP_0603 126.55,63.85 r180 top locked
C99 "0,1мкФ" CAP_0603 128.925,61.585 r270 bottom locked
C100 "0,1мкФ" CAP_0603 132.517,63.875 r90 bottom locked
C101 "0,1мкФ" CAP_0603 124.32,56.5 r0 bottom locked
C102 "0,1мкФ" CAP_0603 129.925,51.745 r90 bottom locked
C103 "0,1мкФ" CAP_0603 9.925,42.6 r180 top locked
C104 "0,1мкФ" CAP_0603 17.401,45.676 r270 top locked
C105 "0,1мкФ" CAP_0603 9.5,64.525 r270 top locked
C106 "0,1мкФ" CAP_0603 11.425,42.6 r0 top locked
C107 "100пФ" CAP_0603 14.8,64.475 r270 top locked
C108 "0,1мкФ" CAP_0603 18.9,45.675 r270 top locked
C109 "0,1мкФ" CAP_0603 17.4,30.775 r270 top locked
C110 "0,1мкФ" CAP_0603 29.6,43.825 r90 top locked
C111 "0,1мкФ" CAP_0603 31.6,30.975 r270 top locked
C112 "0,1мкФ" CAP_0603 33.2,59.425 r90 top locked
C113 "0,1мкФ" CAP_0603 38.8,62.775 r270 top
C114 "0,1мкФ" CAP_0603 29.6,51.975 r90 top locked
C115 "10мкФх35B" CAP_C 28.275,6.1 r0 bottom locked
C116 "0,33мкФ" CAP_0805 3.8,54.5 r180 top locked
C117 "0,1мкФ" CAP_0603 19.5,50.275 r90 top locked
C118 "0,1мкФ" CAP_0603 6.4,55.325 r270 top locked
C119 "10мкФх35B" CAP_C 19.4,6.1 r180 bottom locked
C120 "0,1мкФ" CAP_0603 11.825,48.6 r180 top locked
C121 "0,1мкФ" CAP_0603 11.8,52.325 r270 top locked
C122 "0,1мкФ" CAP_0603 11.8,55.325 r270 top locked
C123 "0,1мкФ" CAP_0603 1.975,48.9 r0 top locked
C124A25 "0,1мкФ" CAP_0603 75.925,85.55 r0 top (schematic designator C124)
C124A26 "0,1мкФ" CAP_0603 63.95,85.55 r0 top (schematic designator C124)
C125A25 "0,1мкФ" CAP_0603 75.9,100.375 r0 top (schematic designator C125)
C125A26 "0,1мкФ" CAP_0603 63.95,100.375 r0 top (schematic designator C125)
C126A25 "10нФ" CAP_0603 82.35,101.825 r0 top (schematic designator C126)
C126A26 "10нФ" CAP_0603 70.375,101.825 r0 top (schematic designator C126)
C127A25 "0,1мкФ" CAP_0603 79.31,101.873 r270 bottom (schematic designator C127)
C127A26 "0,1мкФ" CAP_0603 67.375,101.873 r270 bottom (schematic designator C127)
DA1 "TMR 3-2411" "TMR3 (SIP-8)" 143.95,2.1 r90 top
DA2 "KF33BD-TR" SOIC-8 125.5,41.826 r0 top
DA3A1 "ADA4817-1ARDZ" "SOIC-8 EPAD" 14.2,103.175 r0 top (schematic designator DA3)
DA3A2 "ADA4817-1ARDZ" "SOIC-8 EPAD" 14.2,90.275 r0 top (schematic designator DA3)
DA3A3 "ADA4817-1ARDZ" "SOIC-8 EPAD" 14.2,77.375 r0 top (schematic designator DA3)
DA3A4 "ADA4817-1ARDZ" "SOIC-8 EPAD" 41,103.175 r0 top (schematic designator DA3)
DA3A5 "ADA4817-1ARDZ" "SOIC-8 EPAD" 41,90.275 r0 top (schematic designator DA3)
DA3A6 "ADA4817-1ARDZ" "SOIC-8 EPAD" 41,77.375 r0 top (schematic designator DA3)
DA4A1 "TLV3501AIDBVR" SOT-23-6 23.675,102.975 r90 top (schematic designator DA4)
DA4A2 "TLV3501AIDBVR" SOT-23-6 23.675,90.075 r90 top (schematic designator DA4)
DA4A3 "TLV3501AIDBVR" SOT-23-6 23.675,77.175 r90 top (schematic designator DA4)
DA4A4 "TLV3501AIDBVR" SOT-23-6 50.475,102.975 r90 top (schematic designator DA4)
DA4A5 "TLV3501AIDBVR" SOT-23-6 50.475,90.075 r90 top (schematic designator DA4)
DA4A6 "TLV3501AIDBVR" SOT-23-6 50.475,77.175 r90 top (schematic designator DA4)
DA5 "LMC7101BIM5" SOT-23-5 132.35,92.25 r0 top locked
DA6 "LMC7101BIM5" SOT-23-5 132.35,97.55 r0 top locked
DA7A13 "SN74LVC1G3157DBV" SOT-23-6 48.8,29.8 r0 top (schematic designator DA7)
DA7A14 "SN74LVC1G3157DBV" SOT-23-6 74.425,29.8 r0 top (schematic designator DA7)
DA7A15 "SN74LVC1G3157DBV" SOT-23-6 100.05,29.8 r0 top (schematic designator DA7)
DA7A16 "SN74LVC1G3157DBV" SOT-23-6 125.675,29.8 r0 top (schematic designator DA7)
DA8A13 "TME 2412S" "TME (SIP-4)" 57.85,9.695 r270 top (schematic designator DA8)
DA8A14 "TME 2412S" "TME (SIP-4)" 83.45,9.695 r270 top (schematic designator DA8)
DA8A15 "TME 2412S" "TME (SIP-4)" 109.075,9.695 r270 top (schematic designator DA8)
DA8A16 "TME 2412S" "TME (SIP-4)" 134.7,9.695 r270 top (schematic designator DA8)
DA9A13 "L78L05ABUTR" SOT-89 42.2,8.075 r180 top (schematic designator DA9)
DA9A14 "L78L05ABUTR" SOT-89 67.825,8.075 r180 top (schematic designator DA9)
DA9A15 "L78L05ABUTR" SOT-89 93.475,8.075 r180 top (schematic designator DA9)
DA9A16 "L78L05ABUTR" SOT-89 119.075,8.075 r180 top (schematic designator DA9)
DA10A13 "LMC7101BIM5" SOT-23-5 55.1,9.825 r270 top (schematic designator DA10)
DA10A14 "LMC7101BIM5" SOT-23-5 80.7,9.825 r270 top (schematic designator DA10)
DA10A15 "LMC7101BIM5" SOT-23-5 106.325,9.825 r270 top (schematic designator DA10)
DA10A16 "LMC7101BIM5" SOT-23-5 131.95,9.825 r270 top (schematic designator DA10)
DA11 "TME 2405S" "TME (SIP-4)" 127.575,100.305 r90 top
DA12 "LMC7101BIM5" SOT-23-5 108.125,102.813 r0 top
DA13 "TME 2405S" "TME (SIP-4)" 103.925,100.305 r90 top
DA14 "LMC7101BIM5" SOT-23-5 90.65,102.813 r180 bottom
DA15 "L78L12ABUTR" SOT-89 148.7,76.925 r90 bottom
DA16 "TME 2405S" "TME (SIP-4)" 150.305,28.625 r0 top
DA17 "TPD4S009DBVR" SOT-23-6 144.375,47.625 r180 bottom locked
DA18 "LMC7101BIM5" SOT-23-5 11.15,64.65 r0 top locked
DA19 "LMC7101BIM5" SOT-23-5 34.95,61.2 r0 top locked
DA20 "TMR 4-2415" "TMR4 (SIP-8)" 32.08,2.6 r180 top locked
DA21 "L78M05CDT-TR" TO-252 1.8,58.6 r0 top locked
DA22 "LM7301IM5X/NOPB" SOT-23-5 13.55,50 r90 top locked
DA23A25 "LMC7101BIM5" SOT-23-5 80.935,100.136 r0 bottom (schematic designator DA23)
DA23A26 "LMC7101BIM5" SOT-23-5 69,100.136 r0 bottom (schematic designator DA23)
DD1 "STM32F405ZGT6" LQFP-144 77.55,68.55 r270 top
DD2 "W25Q16JVSNIQ" SOIC-8 85.225,65.725 r0 top
DD3 "SN74LVC1G17DBV" SOT-23-5 139.5,85.975 r180 bottom
DD4A13 "ADUM1400CRW" SOIC-16W 54.74,25.025 r270 top (schematic designator DD4)
DD4A14 "ADUM1400CRW" SOIC-16W 80.375,25.025 r270 top (schematic designator DD4)
DD4A15 "ADUM1400CRW" SOIC-16W 106.015,25.025 r270 top (schematic designator DD4)
DD4A16 "ADUM1400CRW" SOIC-16W 131.645,25.025 r270 top (schematic designator DD4)
DD5A13 "ADUM1200CR" SOIC-8 39.85,15.425 r90 top (schematic designator DD5)
DD5A14 "ADUM1200CR" SOIC-8 65.475,15.425 r90 top (schematic designator DD5)
DD5A15 "ADUM1200CR" SOIC-8 91.125,15.425 r90 top (schematic designator DD5)
DD5A16 "ADUM1200CR" SOIC-8 116.75,15.425 r90 top (schematic designator DD5)
DD6 "ADUM1401CRW" SOIC-16W 121.275,97.428 r270 top
DD7 "ADUM1100BR" SOIC-8 106.226,88.037 r90 top
DD8 "ADM3054BRWZ" SOIC-16W 121.275,87.828 r90 bottom
DD9 "ADUM1401CRW" SOIC-16W 97.66,97.428 r270 top
DD10 "ADUM1100BR" SOIC-8 92.575,88.037 r90 bottom
DD11 "SN74LVC1G17DBV" SOT-23-5 139.5,70.225 r180 bottom
DD12 "SN74LVC1G17DBV" SOT-23-5 139.5,75.475 r180 bottom
DD13 "SN74LVC1G17DBV" SOT-23-5 139.5,80.725 r180 bottom
DD14 "ADUM1100BR" SOIC-8 149.325,38.025 r180 top
DD15 "W5100S-L" LQFP-48 133.375,54.15 r180 top locked
DD16 "ADM101EARM" MSOP-10 14.475,44.2 r180 top locked
DD17 "ADUM1201CR" SOIC-8 27.6,43.8 r180 top locked
DD18 "ADUM1400CRW" SOIC-16W 19.7,30.82 r0 top locked
DD19 "ADUM1100BR" SOIC-8 27.6,49.4 r180 top locked
DD20A25 "ADUM1401CRW" SOIC-16W 76.075,87.825 r90 top (schematic designator DD20)
DD20A26 "ADUM1401CRW" SOIC-16W 64.11,87.825 r90 top (schematic designator DD20)
GB1 "DS1092-12-N8S" DS1092-12-N8S 100.725,52.55 r90 top
L1 "BLM21PG221SN1D" IND_0805 47.4,67.6 r180 bottom
L2 "BLM21PG221SN1D" IND_0805 47.4,63.6 r180 bottom
L3 "BLM21PG221SN1D" IND_0805 133.475,59.95 r270 bottom locked
L4 "BLM21PG221SN1D" IND_0805 132.275,55.65 r0 bottom locked
L5 "BLM21PG221SN1D" IND_0805 126.575,64.05 r0 bottom locked
L6 "BLM21PG221SN1D" IND_0805 8.1,55.5 r0 top locked
L7 "BLM21PG221SN1D" IND_0805 1.8,52.6 r270 top locked
R1 "0" RES_0805 47.4,65.7 r180 bottom
R2 "0" RES_0805 47.4,61.7 r180 bottom
R3 "10к" RES_0603 60.9,60.775 r90 bottom
R4 "200" RES_0603 94.2,40.3 r0 top
R5 "200" RES_0603 94.2,42.2 r0 top
R6 "200" RES_0603 94.2,44.1 r0 top
R7 "10к" RES_0603 81.7,63.55 r90 top
R8 "0" RES_0603 81.7,66.45 r90 top
R9A1 "1М" RES_0805 12,100.275 r270 top (schematic designator R9)
R9A2 "1М" RES_0805 12,87.375 r270 top (schematic designator R9)
R9A3 "1М" RES_0805 12,74.475 r270 top (schematic designator R9)
R9A4 "1М" RES_0805 38.8,100.275 r270 top (schematic designator R9)
R9A5 "1М" RES_0805 38.8,87.375 r270 top (schematic designator R9)
R9A6 "1М" RES_0805 38.8,74.475 r270 top (schematic designator R9)
R10A1 "1М" RES_0805 12,104.175 r270 top (schematic designator R10)
R10A2 "1М" RES_0805 12,91.275 r270 top (schematic designator R10)
R10A3 "1М" RES_0805 12,78.375 r270 top (schematic designator R10)
R10A4 "1М" RES_0805 38.8,104.175 r270 top (schematic designator R10)
R10A5 "1М" RES_0805 38.8,91.275 r270 top (schematic designator R10)
R10A6 "1М" RES_0805 38.8,78.375 r270 top (schematic designator R10)
R11A1 "5,1к" RES_0603 22.1,100.075 r0 top (schematic designator R11)
R11A2 "5,1к" RES_0603 22.1,87.15 r0 top (schematic designator R11)
R11A3 "5,1к" RES_0603 22.1,74.25 r0 top (schematic designator R11)
R11A4 "5,1к" RES_0603 48.9,100.075 r0 top (schematic designator R11)
R11A5 "5,1к" RES_0603 48.9,87.15 r0 top (schematic designator R11)
R11A6 "5,1к" RES_0603 48.9,74.25 r0 top (schematic designator R11)
R12A1 "10к" RES_0603 23.7,98.575 r180 top (schematic designator R12)
R12A2 "10к" RES_0603 23.7,85.65 r180 top (schematic designator R12)
R12A3 "10к" RES_0603 23.7,72.75 r180 top (schematic designator R12)
R12A4 "10к" RES_0603 50.5,98.575 r180 top (schematic designator R12)
R12A5 "10к" RES_0603 50.5,85.65 r180 top (schematic designator R12)
R12A6 "10к" RES_0603 50.5,72.75 r180 top (schematic designator R12)
R13A1 "10к" RES_0603 25.05,100.075 r0 top (schematic designator R13)
R13A2 "10к" RES_0603 25.05,87.15 r0 top (schematic designator R13)
R13A3 "10к" RES_0603 25.05,74.25 r0 top (schematic designator R13)
R13A4 "10к" RES_0603 51.85,100.075 r0 top (schematic designator R13)
R13A5 "10к" RES_0603 51.85,87.15 r0 top (schematic designator R13)
R13A6 "10к" RES_0603 51.85,74.25 r0 top (schematic designator R13)
R14A1 "10к" RES_0603 23.7,101.575 r180 top (schematic designator R14)
R14A2 "10к" RES_0603 23.7,88.65 r180 top (schematic designator R14)
R14A3 "10к" RES_0603 23.7,75.75 r180 top (schematic designator R14)
R14A4 "10к" RES_0603 50.5,101.575 r180 top (schematic designator R14)
R14A5 "10к" RES_0603 50.5,88.65 r180 top (schematic designator R14)
R14A6 "10к" RES_0603 50.5,75.75 r180 top (schematic designator R14)
R15A1 "10к" RES_0603 33.425,104.35 r270 top (schematic designator R15)
R15A2 "10к" RES_0603 33.425,91.45 r270 top (schematic designator R15)
R15A3 "10к" RES_0603 33.425,78.55 r270 top (schematic designator R15)
R15A4 "10к" RES_0603 60.225,104.35 r270 top (schematic designator R15)
R15A5 "10к" RES_0603 60.225,91.45 r270 top (schematic designator R15)
R15A6 "10к" RES_0603 60.225,78.55 r270 top (schematic designator R15)
R16A1 "100к" 3224W 31.425,105.925 r90 top (schematic designator R16)
R16A2 "100к" 3224W 31.425,93.025 r90 top (schematic designator R16)
R16A3 "100к" 3224W 31.425,80.125 r90 top (schematic designator R16)
R16A4 "100к" 3224W 58.225,105.925 r90 top (schematic designator R16)
R16A5 "100к" 3224W 58.225,93.025 r90 top (schematic designator R16)
R16A6 "100к" 3224W 58.225,80.125 r90 top (schematic designator R16)
R17A7 "10к" RES_0603 6.975,82.2 r180 bottom (schematic designator R17)
R17A8 "10к" RES_0603 6.975,79.3 r180 bottom (schematic designator R17)
R17A9 "10к" RES_0603 6.975,76.4 r180 bottom (schematic designator R17)
R17A10 "10к" RES_0603 6.975,73.5 r180 bottom (schematic designator R17)
R18A7 "10к" RES_0603 5.375,83.65 r0 bottom (schematic designator R18)
R18A8 "10к" RES_0603 5.375,80.75 r0 bottom (schematic designator R18)
R18A9 "10к" RES_0603 5.375,77.85 r0 bottom (schematic designator R18)
R18A10 "10к" RES_0603 5.375,74.95 r0 bottom (schematic designator R18)
R19 "10к" RES_0603 130.725,88.65 r0 top locked
R20 "12к" RES_0603 130.725,93.95 r0 top locked
R21 "10к" RES_0603 133.875,93.95 r0 top locked
R22 "200" RES_0603 130.7,99.175 r90 top locked
R23 "10к" RES_0603 136.4,99.175 r90 top locked
R24 "10к" RES_0603 130.7,103.775 r270 top locked
R25 "10" RES_1210 139.175,103.225 r180 top locked
R26 "1к" RES_0603 141.65,87.475 r180 bottom
R27 "10к" RES_0603 138.725,87.475 r180 bottom
R28A13 "10к" RES_0603 49.725,13.025 r0 top (schematic designator R28)
R28A14 "10к" RES_0603 75.3,13.025 r0 top (schematic designator R28)
R28A15 "10к" RES_0603 100.925,13.025 r0 top (schematic designator R28)
R28A16 "10к" RES_0603 126.55,13.025 r0 top (schematic designator R28)
R29A13 "10к" RES_0603 42.2,11.525 r0 top (schematic designator R29)
R29A14 "10к" RES_0603 67.825,11.525 r0 top (schematic designator R29)
R29A15 "10к" RES_0603 93.475,11.525 r0 top (schematic designator R29)
R29A16 "10к" RES_0603 119.075,11.525 r0 top (schematic designator R29)
R30A13 "10к" RES_0603 47.15,11.525 r180 top (schematic designator R30)
R30A14 "10к" RES_0603 72.775,11.525 r180 top (schematic designator R30)
R30A15 "10к" RES_0603 98.425,11.525 r180 top (schematic designator R30)
R30A16 "10к" RES_0603 124.05,11.525 r180 top (schematic designator R30)
R31 "10к" RES_0603 108.8,95.95 r90 top
R32 "10к" RES_0603 120.175,100.75 r180 top
R33 "120" RES_0805 109.275,106.388 r90 top
R34 "10к" RES_0603 120.175,102.75 r180 top
R35 "10к" RES_0603 114.8,100.75 r0 top
R36 "10к" RES_0603 90.025,95.95 r90 bottom locked
R37 "10к" RES_0603 96.525,100.75 r180 top
R38 "10к" RES_0603 96.525,102.75 r180 top
R39 "10к" RES_0603 91.375,100.75 r0 top
R40 "1к" RES_0603 141.65,71.725 r180 bottom
R41 "1к" RES_0603 141.65,76.975 r180 bottom
R42 "1к" RES_0603 141.65,82.225 r180 bottom
R43 "10к" RES_0603 138.725,71.725 r180 bottom
R44 "10к" RES_0603 138.725,76.975 r180 bottom
R45 "10к" RES_0603 138.725,82.225 r180 bottom
R46 "200" RES_0603 142.825,76.5 r180 top locked
R47 "200" RES_0603 142.825,79.75 r180 top locked
R48 "200" RES_0603 142.825,83.05 r180 top locked
R49 "200" RES_0603 142.825,86.35 r180 top locked
R50 "200" RES_0603 142.825,91.1 r180 top locked
R51 "200" RES_0603 142.825,95.7 r180 top locked
R52 "200" RES_0603 142.825,100.225 r180 top locked
R53 "10к" RES_0603 151.375,39.275 r0 top
R54 "49,9" RES_0603 141.375,50.228 r180 top locked
R55 "49,9" RES_0603 141.375,54.728 r180 top locked
R56 "49,9" RES_0603 141.375,58.475 r180 top locked
R57 "49,9" RES_0603 141.375,62.975 r180 top locked
R58 "3,3" RES_0603 139.775,51.727 r0 top locked
R59 "3,3" RES_0603 139.775,59.975 r0 top locked
R60 "1к" RES_0603 141.375,68.162 r180 top locked
R61 "3,3" RES_0603 139.775,53.228 r0 top locked
R62 "3,3" RES_0603 139.775,61.475 r0 top locked
R63 "1к" RES_0603 141.375,66.662 r180 top locked
R64 "300" RES_0603 136.025,68.162 r0 top locked
R65 "1М" RES_0603 132.675,64.35 r180 top locked
R66 "12к" RES_0603 137.625,66.662 r180 top locked
R67 "0" RES_0603 129.375,66.625 r90 top locked
R68 "10к" RES_0603 132.05,50.05 r0 top locked
R69 "10к" RES_0603 18.925,41.2 r180 top locked
R70 "10к" RES_0603 9.975,31.8 r180 top locked
R71 "10к" RES_0603 11.175,58.15 r0 top locked
R72 "10к" RES_0603 18.925,38.2 r180 top locked
R73 "10к" RES_0603 9.975,28.8 r180 top locked
R74 "22к" RES_0603 11.2,59.575 r90 top locked
R75 "10к" RES_0603 18.925,35.2 r180 top locked
R76 "10к" RES_0603 9.975,25.8 r180 top locked
R77 "10к" RES_0603 18.925,32.2 r180 top locked
R78 "10к" RES_0603 12.7,61.175 r270 top locked
R79 "10к" RES_0603 9.975,22.8 r180 top locked
R80 "10к" RES_0603 8.375,27.3 r0 top locked
R81 "10к" RES_0603 8.375,21.3 r0 top locked
R82 "390" RES_0603 17.325,42.7 r0 top locked
R83 "390" RES_0603 17.325,39.7 r0 top locked
R84 "390" RES_0603 17.325,36.7 r0 top locked
R85 "390" RES_0603 17.325,33.7 r0 top locked
R86 "10к" RES_0603 8.375,30.3 r0 top locked
R87 "10к" RES_0603 8.375,24.3 r0 top locked
R88 "330" RES_0603 16.3,64.475 r270 top locked
R89 "10к" RES_0603 31.575,42 r180 top locked
R90 "150к" RES_0603 14.2,61.175 r270 top locked
R91 "10к" RES_0603 31.575,39.5 r180 top locked
R92 "10к" RES_0603 31.575,36.9 r180 top locked
R93 "10к" RES_0603 31.575,34.4 r180 top locked
R94 "150к" RES_0603 35.225,57.8 r0 top locked
R95 "10к" RES_0603 35.225,62.725 r0 top
R96 "200" RES_0603 29.975,10.7 r0 top locked
R97 "200" RES_0603 29.975,13.3 r0 top locked
R98 "200" RES_0603 29.975,15.8 r0 top locked
R99 "200" RES_0603 29.975,18.4 r0 top locked
R100 "0" RES_0603 21.025,10.7 r0 bottom
R101 "0" RES_0603 21.025,13.275 r0 bottom
R102 "0" RES_0603 21.025,15.8 r0 bottom
R103 "0" RES_0603 21.025,18.325 r0 bottom
R104 "10к" RES_0603 17,51.875 r270 top locked
R105 "NA" RES_0603 19.525,10.7 r180 bottom
R106 "NA" RES_0603 19.525,13.275 r180 bottom
R107 "NA" RES_0603 19.525,15.8 r180 bottom
R108 "NA" RES_0603 19.525,18.325 r180 bottom
R109 "0" RES_0805 8.1,53.5 r0 top locked
R110 "10к" RES_0603 18.275,53.8 r180 top locked
R111 "0" RES_0805 3.8,52.6 r270 top locked
R112 "10к" RES_0603 17.325,12.1 r0 top locked
R113 "10к" RES_0603 17.325,14.6 r0 top locked
R114 "6,04к" RES_0603 15.375,53.8 r180 top locked
R115 "10к" RES_0603 17.325,17.2 r0 top locked
R116 "10к" RES_0603 17.325,19.6 r0 top locked
R117A25 "10к" RES_0603 80.975,100.3 r90 top (schematic designator R117)
R117A26 "10к" RES_0603 69,100.3 r90 top (schematic designator R117)
R118A25 "10к" RES_0603 83.95,100.375 r180 top (schematic designator R118)
R118A26 "10к" RES_0603 71.975,100.375 r180 top (schematic designator R118)
U1 "TLP291(GB-TP,SE" 11-3C1 145.1,76.475 r0 top locked
U2 "TLP291(GB-TP,SE" 11-3C1 145.1,79.775 r0 top locked
U3 "TLP291(GB-TP,SE" 11-3C1 145.1,83.075 r0 top locked
U4 "TLP291(GB-TP,SE" 11-3C1 145.1,86.375 r0 top locked
U5 "TLP127" 11-4C1 145.1,91.05 r0 top locked
U6 "TLP127" 11-4C1 145.1,95.65 r0 top locked
U7 "TLP127" 11-4C1 145.1,100.225 r0 top locked
U8 "TLP291-4" SOP-16 21.48,42.01 r0 top locked
U9 "HCNR-200-500E" HCNR200 18.875,65.45 r0 top locked
U10 "TLP291-4" SOP-16 27.6,10.73 r180 top locked
VD1 "KP-2012MGC" LED_0805 97.475,40.3 r0 top
VD2 "KP-2012SEC" LED_0805 97.476,42.2 r0 top
VD3 "KP-2012EC" LED_0805 97.476,44.1 r0 top
VD4 "BZX384-C5V1" SOD-323 11.925,21.3 r0 top locked
VD5 "BZX384-C5V1" SOD-323 11.925,24.3 r0 top locked
VD6 "BZX384-C5V1" SOD-323 11.925,27.3 r0 top locked
VD7 "BZX384-C5V1" SOD-323 11.925,30.3 r0 top locked
VT1 "AO3400A" SOT-23-3 132.45,101.95 r90 top locked
XP1 "B12B-PHDSS" B12B-PHDSS 3.55,97.3 r90 top
XP2 "B8B-PHDSS" B8B-PHDSS 3.625,81.575 r90 top
XP3 "B2P-VH" B2P-VH 152.74,15.4 r0 top locked
XP4 "PLD-6" PLD-6 83.55,45.31 r0 top
XP5 "B2B-EH-A" B2B-EH-A 135.9,107.7 r180 top locked
XP6 "B2B-EH-A" B2B-EH-A 147.325,107.7 r180 top locked
XP7A13 "B8B-PHDSS" B8B-PHDSS 45.9,3.625 r180 top (schematic designator XP7)
XP7A14 "B8B-PHDSS" B8B-PHDSS 71.5,3.625 r180 top (schematic designator XP7)
XP7A15 "B8B-PHDSS" B8B-PHDSS 97.125,3.625 r180 top (schematic designator XP7)
XP7A16 "B8B-PHDSS" B8B-PHDSS 122.75,3.625 r180 top (schematic designator XP7)
XP8 "B8B-PHDSS" B8B-PHDSS 118.825,106.375 r0 top
XP9 "B8B-PHDSS" B8B-PHDSS 95.65,106.375 r0 top
XP10 "B8B-PHDSS" B8B-PHDSS 156.375,68.75 r270 top locked
XP11 "B8B-PHDSS" B8B-PHDSS 156.375,80.3 r270 top locked
XP12 "B8B-PHDSS" B8B-PHDSS 156.375,91.85 r270 top locked
XP13 "B3B-EH-A" B3B-EH-A 157.425,37.075 r90 top
XP14 "B24B-PHDSS" B24B-PHDSS 3.6,40.5 r90 top locked
XP15A25 "B8B-PHDSS" B8B-PHDSS 83.625,106.375 r0 top (schematic designator XP15)
XP15A26 "B8B-PHDSS" B8B-PHDSS 71.625,106.375 r0 top (schematic designator XP15)
XS1 "LPJD0012BENL" LPJD0012BENL 146.815,51.857 r90 top locked
ZQ1 "16МГц" NX2520SA 66,74.6 r0 top
ZQ2 "32,768кГц" NX3215SA 71.6,74 r90 top
ZQ3 "25МГц" 7M 132.775,66.15 r90 top locked

## Footprints (in the part's own frame and the unit in brackets; to place one, negate y for a bottom-side part, rotate by r counter-clockwise, add the part's x,y. Pads: shape width x height; smd on the part's side, far side on the other; paste and mask are expansions set on the pad)
7M [mm]
  rect 1.4x1.2 smd: 1(0,0) 2(2.2,0.025) 3(2.2,1.725) 4(0,1.725)
  silkscreen extent -0.92,-0.82 3.13,2.55, body extent -0.55,-0.45 2.75,2.15, height 0.8
11-3C1 [mm]
  rect 1.5x0.8 smd: 1(0,0) 2(0,-1.275) 3(6.4,-1.275) 4(6.4,-0.025)
  silkscreen extent -0.12,-1.95 5.25,1, body extent -0.28,-1.95 6.73,0.65, height 2.2
11-4C1 [mm]
  rect 1.5x0.8 smd: 1(0,0) 3(0,-2.55) 4(6.4,-2.55) 6(6.4,-0.025)
  silkscreen extent -0.12,-3.17 5.25,1, body extent -0.15,-3.07 6.65,0.52, height 2.55
3224W [mm]
  rect 2.2x1.3 smd: 1(0,0) 3(0,2.525)
  rect 2.2x2 smd: 2(-3.45,1.3)
  silkscreen extent -3.72,-1.12 0.25,3.72, body extent -3.72,-1.12 0.23,3.71, height 5.29
B2B-EH-A [mm]
  rect 1.8x1.8 hole 0.965: 1(0,0)
  round 1.8 hole 1: 2(2.5,0)
  silkscreen extent -2.45,-2.2 5.05,2.6, body extent -2.45,-2.2 5.05,1.6, height 6
B2P-VH [mm]
  rect 2.8x2.8 hole 1.8: 1(0,0)
  round 2.8 hole 1.8: 2(3.96,0)
  silkscreen extent -1.92,-4.75 5.92,6.5, body extent -1.93,-4.75 5.93,3.75, height 10.9
B3B-EH-A [mm]
  rect 1.8x1.8 hole 0.965: 1(0,0)
  round 1.8 hole 1: 2(2.5,0) 3(5,0)
  silkscreen extent -2.5,-2.5 7.5,2.85, body extent -2.5,-2.25 7.5,1.55, height 6
B8B-PHDSS [mm]
  rect 1.2x1.2 hole 0.8: 1(0,0)
  round 1.2 hole 0.8: 2(0,2) 3(-2,0) 4(-2,2) 5(-4,0) 6(-4,2) 7(-6,0) 8(-6,2)
  silkscreen extent -7.93,-2.47 1.97,3.52, body extent -7.93,-1.48 1.97,3.52, height 6.5
B12B-PHDSS [mm]
  rect 1.2x1.2 hole 0.8: 1(0,0)
  round 1.2 hole 0.8: 2(0,2) 3(-2,0) 4(-2,2) 5(-4,0) 6(-4,2) 7(-6,0) 8(-6,2) 9(-8,0) 10(-8,2) 11(-10,0) 12(-10,2)
  silkscreen extent -11.95,-2.47 1.95,3.5, body extent -11.95,-1.5 1.95,3.5, height 6.5
B24B-PHDSS [mm]
  rect 1.2x1.2 hole 0.8: 1(0,0)
  round 1.2 hole 0.8: 2(0,2) 3(-2,0) 4(-2,2) 5(-4,0) 6(-4,2) 7(-6,0) 8(-6,2) 9(-8,0) 10(-8,2) 11(-10,0) 12(-10,2) 13(-12,0) 14(-12,2) 15(-14,0) 16(-14,2) 17(-16,0) 18(-16,2) 19(-18,0) 20(-18,2) 21(-20,0) 22(-20,2) 23(-22,0) 24(-22,2)
  silkscreen extent -23.95,-2.47 1.95,3.5, body extent -23.95,-1.5 1.95,3.5, height 6.5
CAP_0603 [mm]
  rect 0.85x0.95 smd: 1(0.025,0) 2(1.575,0)
  silkscreen extent -0.58,-0.65 2.17,0.65, body extent 0.03,-0.42 1.63,0.44, height 0.8
CAP_0805 [mm]
  rect 1.27x1.27 smd: 1(0,0) 2(2,0)
  silkscreen extent -0.85,-0.85 2.85,0.85, body extent 0,-0.62 2,0.63, height 1
CAP_1206 [mm]
  rect 1.6x1.8 smd: 1(0,0) 2(2.8,0)
  silkscreen extent -1.02,-1.12 3.83,1.12, body extent -0.25,-0.77 2.95,0.83, height 0.94
CAP_A [mm]
  rect 2x1.2 smd: 1(0,0) 2(2.8,0)
  silkscreen extent -2.15,-0.82 4.03,0.82, body extent -0.33,-0.8 3.13,0.8, height 1.65
CAP_B [mm]
  rect 2x2.2 smd: 1(0,0) 2(3,0)
  silkscreen extent -2.15,-1.4 4.25,1.4, body extent -0.25,-1.4 3.25,1.4, height 1.9
CAP_C [mm]
  rect 2.6x2.2 smd: 1(0,0) 2(5,0)
  silkscreen extent -2.4,-1.58 6.53,1.6, body extent -0.5,-1.6 5.5,1.6, height 2.5
DS1092-12-N8S [mm]
  rect 3.9x2.4 smd: 1(0,0) 2(16,0)
  round 1.2 hole 1.2: 1(4,0)
  round 1.5 hole 1.5: 1(11.5,0)
  silkscreen extent 0,-7.37 17.4,7.37, body extent -1.4,-7.37 17.4,7.37, height 4.23
HCNR200 [mm]
  rect 2.3x1.3 smd: 1(0,0) 2(0.05,-2.55) 3(0,-5.1) 4(0,-7.65) 5(11.275,-7.65) 6(11.275,-5.1) 7(11.325,-2.55) 8(11.275,0)
  silkscreen extent -0.15,-9.48 9.72,1.83, body extent -0.08,-9.47 11.33,1.83, height 5.2
IND_0805 [mm]
  rect 1.27x1.27 smd: 1(0,0) 2(2,0)
  silkscreen extent -0.85,-0.85 2.85,0.85, body extent 0,-0.62 2,0.63, height 0.85
LED_0805 [mm]
  rect 1.27x1.27 smd: 1(0,0) 2(2,0)
  silkscreen extent -0.85,-0.85 3.22,0.85, body extent -0.03,-0.46 2.03,0.45, height 0.85
LPJD0012BENL [mm]
  rect 1.4x1.4 hole 0.9: 1(0,0)
  round 1.4 hole 0.9: 2(1.27,2.54) 3(2.54,0) 4(3.81,2.54) 5(5.08,0) 6(6.35,2.54) 7(7.62,0) 8(8.89,2.54)
  round 1.6 hole 1.02: 9(-1.907,-10.46) 10(0.633,-10.46) 11(8.223,-10.46) 12(10.763,-10.46)
  round 2.1 hole 1.6: 13(-3.475,-2.46) 14(12.365,-2.46)
  round 0 hole 3.25 unplated: ""(-1.27,-6.35) ""(10.16,-6.35)
  silkscreen extent -3.57,-13.08 12.42,3.62, body extent -3.57,-13.08 12.42,3.63, height 17.4
LQFP-48 [mm]
  rect 1.8x0.3 smd: 1(0,0) 2(0,-0.5) 3(0,-1) 4(0,-1.5) 5(0,-2) 6(0,-2.5) 7(0,-3) 8(0,-3.5) 9(0,-4) 10(0,-4.5) 11(0,-5) 12(0,-5.5) 25(8.1,-5.5) 26(8.1,-5) 27(8.1,-4.5) 28(8.1,-4) 29(8.1,-3.5) 30(8.1,-3) 31(8.1,-2.5) 32(8.1,-2) 33(8.1,-1.5) 34(8.1,-1) 35(8.1,-0.5) 36(8.1,0)
  rect 0.3x1.8 smd: 13(1.3,-6.8) 14(1.8,-6.8) 15(2.3,-6.8) 16(2.8,-6.8) 17(3.3,-6.8) 18(3.8,-6.8) 19(4.3,-6.8) 20(4.8,-6.8) 21(5.3,-6.8) 22(5.8,-6.8) 23(6.3,-6.8) 24(6.8,-6.8) 37(6.8,1.3) 38(6.3,1.3) 39(5.8,1.3) 40(5.3,1.3) 41(4.8,1.3) 42(4.3,1.3) 43(3.8,1.3) 44(3.3,1.3) 45(2.8,1.3) 46(2.3,1.3) 47(1.8,1.3) 48(1.3,1.3)
  silkscreen extent -0.13,-5.6 6.9,0.92, body extent -0.45,-7.25 8.55,1.75, height 1.6
LQFP-144 [mm]
  rect 1.45x0.3 smd: 1(0,0) 2(0,-0.5) 3(0,-1) 4(0,-1.5) 5(0,-2) 6(0,-2.5) 7(0,-3) 8(0,-3.5) 9(0,-4) 10(0,-4.5) 11(0,-5) 12(0,-5.5) 13(0,-6) 14(0,-6.5) 15(0,-7) 16(0,-7.5) 17(0,-8) 18(0,-8.5) 19(0,-9) 20(0,-9.5) 21(0,-10) 22(0,-10.5) 23(0,-11) 24(0,-11.5) 25(0,-12) 26(0,-12.5) 27(0,-13) 28(0,-13.5) 29(0,-14) 30(0,-14.5) 31(0,-15) 32(0,-15.5) 33(0,-16) 34(0,-16.5) 35(0,-17) 36(0,-17.5) 73(21.45,-17.5) 74(21.45,-17) 75(21.45,-16.5) 76(21.45,-16) 77(21.45,-15.5) 78(21.45,-15) 79(21.45,-14.5) 80(21.45,-14) 81(21.45,-13.5) 82(21.45,-13) 83(21.45,-12.5) 84(21.45,-12) 85(21.45,-11.5) 86(21.45,-11) 87(21.45,-10.5) 88(21.45,-10) 89(21.45,-9.5) 90(21.45,-9) 91(21.45,-8.5) 92(21.45,-8) 93(21.45,-7.5) 94(21.45,-7) 95(21.45,-6.5) 96(21.45,-6) 97(21.45,-5.5) 98(21.45,-5) 99(21.45,-4.5) 100(21.45,-4) 101(21.45,-3.5) 102(21.45,-3) 103(21.45,-2.5) 104(21.45,-2) 105(21.45,-1.5) 106(21.45,-1) 107(21.45,-0.5) 108(21.45,0)
  rect 0.3x1.45 smd: 37(1.975,-19.475) 38(2.475,-19.475) 39(2.975,-19.475) 40(3.475,-19.475) 41(3.975,-19.475) 42(4.475,-19.475) 43(4.975,-19.475) 44(5.475,-19.475) 45(5.975,-19.475) 46(6.475,-19.475) 47(6.975,-19.475) 48(7.475,-19.475) 49(7.975,-19.475) 50(8.475,-19.475) 51(8.975,-19.475) 52(9.475,-19.475) 53(9.975,-19.475) 54(10.475,-19.475) 55(10.975,-19.475) 56(11.475,-19.475) 57(11.975,-19.475) 58(12.475,-19.475) 59(12.975,-19.475) 60(13.475,-19.475) 61(13.975,-19.475) 62(14.475,-19.475) 63(14.975,-19.475) 64(15.475,-19.475) 65(15.975,-19.475) 66(16.475,-19.475) 67(16.975,-19.475) 68(17.475,-19.475) 69(17.975,-19.475) 70(18.475,-19.475) 71(18.975,-19.475) 72(19.475,-19.475) 109(19.475,1.975) 110(18.975,1.975) 111(18.475,1.975) 112(17.975,1.975) 113(17.475,1.975) 114(16.975,1.975) 115(16.475,1.975) 116(15.975,1.975) 117(15.475,1.975) 118(14.975,1.975) 119(14.475,1.975) 120(13.975,1.975) 121(13.475,1.975) 122(12.975,1.975) 123(12.475,1.975) 124(11.975,1.975) 125(11.475,1.975) 126(10.975,1.975) 127(10.475,1.975) 128(9.975,1.975) 129(9.475,1.975) 130(8.975,1.975) 131(8.475,1.975) 132(7.975,1.975) 133(7.475,1.975) 134(6.975,1.975) 135(6.475,1.975) 136(5.975,1.975) 137(5.475,1.975) 138(4.975,1.975) 139(4.475,1.975) 140(3.975,1.975) 141(3.475,1.975) 142(2.975,1.975) 143(2.475,1.975) 144(1.975,1.975)
  silkscreen extent -0.12,-18.35 20.33,0.85, body extent -0.28,-19.75 21.72,2.25, height 1.63
MSOP-10 [mm]
  rect 1.4x0.4 smd: 1(-0.025,0) 2(-0.025,-0.5) 3(-0.025,-1) 4(-0.025,-1.5) 5(-0.025,-2) 6(4.575,-2) 7(4.575,-1.5) 8(4.575,-1) 9(4.575,-0.5) 10(4.575,0)
  silkscreen extent -0.1,-2.5 3.62,0.67, body extent -0.21,-2.5 4.81,0.5, height 1.05
NX2520SA [mm]
  rect 1.2x1 smd: 1(0,0) 2(1.7,0) 3(1.7,1.3) 4(0,1.3)
  silkscreen extent -0.8,-0.7 2.5,2, body extent -0.4,-0.35 2.1,1.65, height 0.65
NX3215SA [mm]
  rect 1x1.8 smd: 1(0,0) 2(2.5,0)
  silkscreen extent -0.7,-1.1 3.2,1.1, body extent -0.35,-0.75 2.85,0.75, height 0.8
PLD-6 [mm]
  rect 1.6x1.6 hole 1: 1(0,0)
  round 1.6 hole 1: 2(0,2.54) 3(2.54,0) 4(2.54,2.54) 5(5.08,0) 6(5.08,2.54)
  silkscreen extent -1.27,-2.12 6.27,3.81, body extent -1.3,-1.2 6.32,3.8, height 8.5
RES_0603 [mm]
  rect 0.85x0.95 smd: 1(0.025,0) 2(1.575,0)
  silkscreen extent -0.58,-0.65 2.17,0.65, body extent -0.05,-0.48 1.65,0.48, height 0.6
RES_0805 [mm]
  rect 1.27x1.27 smd: 1(0,0) 2(2,0)
  silkscreen extent -0.85,-0.85 2.85,0.85, body extent 0,-0.62 2,0.63, height 0.6
RES_1210 [mm]
  rect 1.6x2.8 smd: 1(-0.025,0.025) 2(2.775,0.025)
  silkscreen extent -1.02,-1.58 3.77,1.63, body extent -0.15,-1.28 2.95,1.33, height 0.57
SOD-323 [mm]
  rect 0.9x0.4 smd: 1(-0.025,0) 2(2.475,0)
  silkscreen extent -1.02,-0.7 3.1,0.72, body extent -0.05,-0.68 2.55,0.67, height 1.1
SOIC-8 [mm]
  rect 1.8x0.6 smd: 1(0,0) 2(0,-1.25) 3(0,-2.55) 4(0,-3.8) 5(6,-3.8) 6(6,-2.55) 7(6,-1.25) 8(6,0)
  silkscreen extent -0.12,-4.38 4.8,0.87, body extent -0.13,-4.37 6.08,0.63, height 1.75
"SOIC-8 EPAD" [mm]
  rect 1.8x0.6 smd: 1(0,0) 2(0,-1.25) 3(0,-2.55) 4(0,-3.8) 5(6,-3.8) 6(6,-2.55) 7(6,-1.25) 8(6,0)
  rect 2.5x3 smd: EPAD(3,-1.9)
  silkscreen extent -0.12,-4.38 4.8,0.87, body extent -0.13,-4.37 6.08,0.63, height 1.75
SOIC-16W [mm]
  rect 2.3x0.6 smd: 1(0,0) 2(0,-1.27) 3(0,-2.54) 4(0,-3.81) 5(0,-5.08) 6(0,-6.35) 7(0,-7.62) 8(0,-8.89) 9(9.6,-8.89) 10(9.6,-7.62) 11(9.6,-6.35) 12(9.6,-5.08) 13(9.6,-3.81) 14(9.6,-2.54) 15(9.6,-1.27) 16(9.6,0)
  silkscreen extent -0.15,-9.9 8.03,1, body extent -0.51,-9.7 10.11,0.8, height 2.62
SOP-16 [mm]
  rect 1.14x0.91 smd: 1(0,0) 2(0,-1.27) 3(0,-2.54) 4(0,-3.81) 5(0,-5.08) 6(0,-6.35) 7(0,-7.62) 8(0,-8.89) 9(6.22,-8.89) 10(6.22,-7.62) 11(6.22,-6.35) 12(6.22,-5.08) 13(6.22,-3.81) 14(6.22,-2.54) 15(6.22,-1.27) 16(6.22,0)
  silkscreen extent -0.1,-9.43 5.3,1, body extent -0.07,-9.44 6.17,0.54, height 1.58
SOT-23-3 [mm]
  rect 1.2x0.55 smd: 1(0,0) 2(0,-1.9) 3(2.15,-0.95)
  silkscreen extent -0.27,-2.5 2,0.65, body extent -0.15,-2.45 2.35,0.55, height 1
SOT-23-5 [mm]
  rect 1.2x0.55 smd: 1(0,0) 2(0,-0.95) 3(0,-1.9) 4(2.15,-1.9) 5(2.15,0)
  silkscreen extent -0.27,-2.5 1.97,0.65, body extent -0.15,-2.45 2.35,0.55, height 1.1
SOT-23-6 [mm]
  rect 1.2x0.55 smd: 1(0,0) 2(0,-0.95) 3(0,-1.9) 4(2.15,-1.9) 5(2.15,-0.95) 6(2.15,0)
  silkscreen extent -0.27,-2.5 1.97,0.65, body extent -0.3,-2.4 2.5,0.5, height 1.18
SOT-89 [mm]
  rect 0.57x1.4 smd: 1(0,0) 3(3,0)
  rect 0.65x1.4 smd: 2(1.5,0)
  Top Layer region: 1.825,0.7 2.5,1.375 2.5,3.825 0.5,3.825 0.5,1.375 1.175,0.7 1.175,-0.7 1.825,-0.7
  Top Layer lines w0.2: 1.5,0 1.5,-0.075
  silkscreen extent -0.82,-0.07 3.75,3, body extent -0.75,-0.42 3.75,3.58, height 1.5
"TME (SIP-4)" [mm]
  rect 1.4x1.4 hole 0.8: 1(0,0)
  round 1.4 hole 0.8: 2(2.54,0) 3(5.08,0) 4(7.62,0)
  silkscreen extent -1.9,-1.7 9.6,5.4, body extent -1.9,-1.7 9.6,5.4, height 10.2
"TMR3 (SIP-8)" [mm]
  rect 1.3x1.3 hole 0.7: 1(0,0)
  round 1.3 hole 0.7: 2(2.54,0) 3(5.08,0) 5(10.16,0) 6(12.7,0) 7(15.24,0) 8(17.78,0)
  silkscreen extent -2,-5.58 19.8,3.5, body extent -2,-5.6 19.8,3.5, height 11.2
"TMR4 (SIP-8)" [mm]
  rect 1.3x1.3 hole 0.7: 1(0,0)
  round 1.3 hole 0.7: 2(2.54,0) 3(5.08,0) 5(10.16,0) 6(12.7,0) 7(15.24,0) 8(17.78,0)
  silkscreen extent -2,-6.7 19.9,2.5, body extent -2,-6.75 19.8,2.55, height 11.4
TO-252 [mm]
  rect 1.5x2.8 smd: 1(0,0) 3(4.575,0)
  rect 6.3x6.1 smd: 2(2.3,6.2)
  silkscreen extent -1.17,-2.12 5.77,8.93, body extent -0.97,-0.94 5.57,9, height 2.44